# EAGLE board SparkFun_Bluetooth_Beacon_IN100-Panel (EAGLE 9.6.2), part 1 of 4
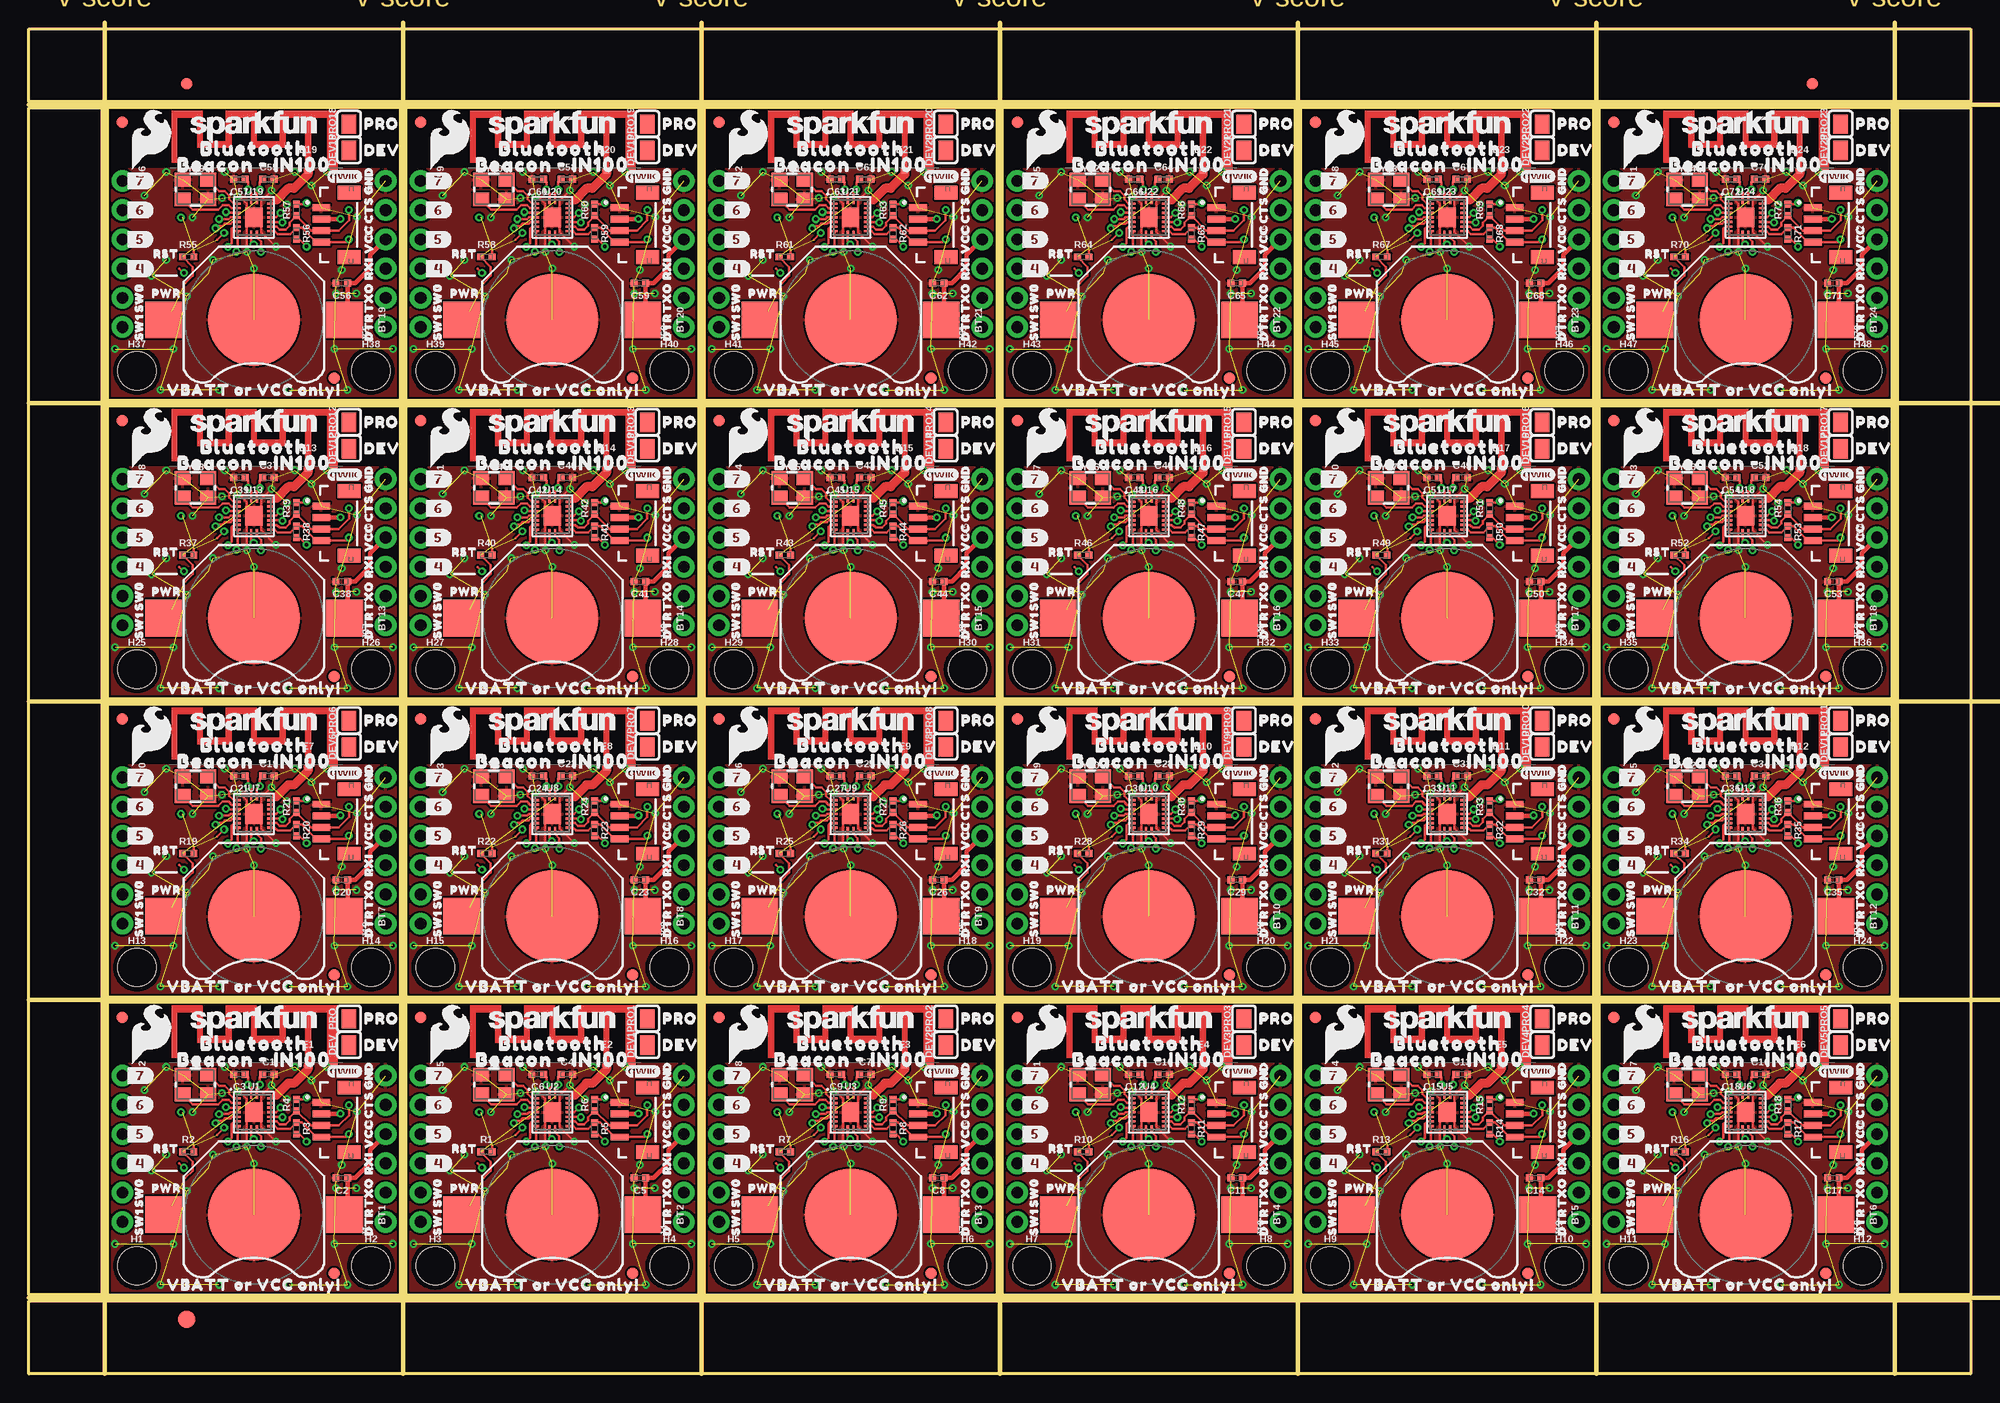
[diagram p0: board, top side]
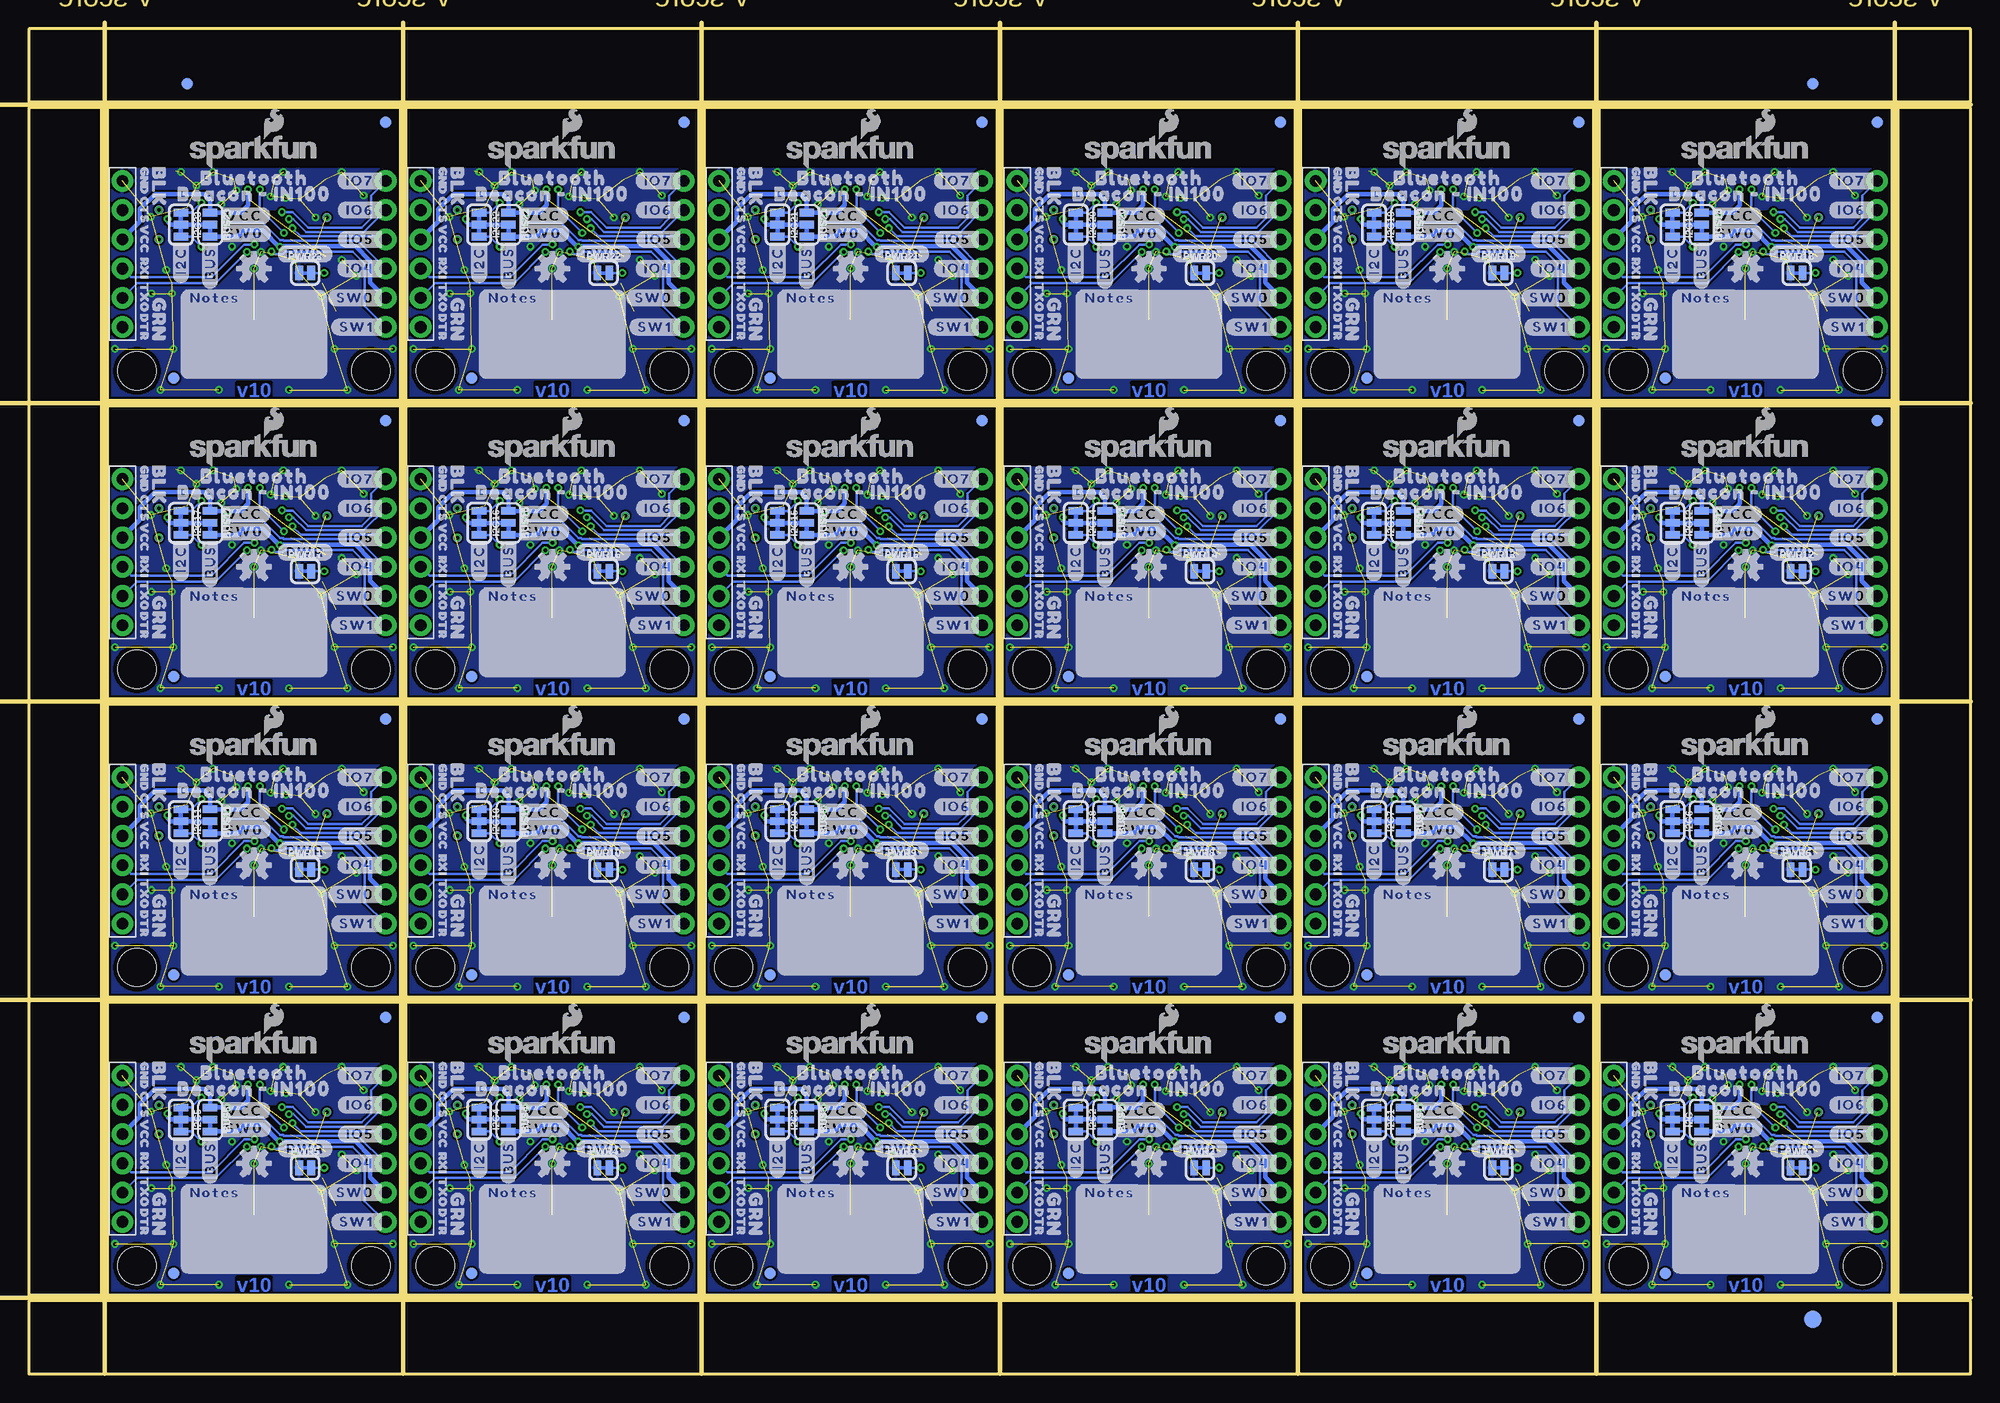
[diagram p1: board, bottom side, seen from below]

Size 168.66 x 116.84 mm. Coordinates in mm from the lower left corner, seen from the top.
Outline: 112 segments
Copper layers (1*16): Top 0.035mm / dielectric 1.5mm / Bottom 0.035mm
Design rules "SparkFun_Bluetooth_Beacon_IN100": minimum track width 7mil, minimum drill 0.3mm, track to track 7mil, track to pad 7mil, pad to pad 7mil, via to via 7mil, smd to smd 7mil, copper to edge 7mil, drill to drill 7mil, minimum pad ring 7mil, minimum via ring 7mil, stop-mask expansion 3mil, vias tented up to drill 25mil, thermal gap 7mil
tRestrict: area 18.5,23.6 to 18.7,23.7; area 20.4,23.6 to 20.6,23.7; area 18.5,21.7 to 18.7,21.8; area 20.4,21.7 to 20.6,21.8; area 44.4,23.6 to 44.6,23.7; area 46.4,23.6 to 46.5,23.7; area 44.4,21.7 to 44.6,21.8; area 46.4,21.7 to 46.5,21.8; area 70.4,23.6 to 70.5,23.7; area 72.3,23.6 to 72.4,23.7; area 70.4,21.7 to 70.5,21.8; area 72.3,21.7 to 72.4,21.8; 84 more areas
bRestrict: area 17.7,23.1 to 18.4,23.2; area 43.6,23.1 to 44.3,23.2; area 69.5,23.1 to 70.2,23.2; area 95.4,23.1 to 96.1,23.2; area 121.3,23.1 to 122,23.2; area 147.2,23.1 to 148,23.2; area 17.7,49 to 18.4,49.1; area 43.6,49 to 44.3,49.1; area 69.5,49 to 70.2,49.1; area 95.4,49 to 96.1,49.1; area 121.3,49 to 122,49.1; area 147.2,49 to 148,49.1; 12 more areas
Milling: 12 lines

## Footprints (pad centres in the part's own frame; a part is rotated, then mirrored left to right if it is on the bottom)
BATTCON_12MM = smd 8 x 8: GND 0,0 | smd 3.175 x 3.175: PWR@1 -7.874,0; PWR@2 7.874,0
SMT-JUMPER_3_1-NC_TRACE_SILK = smd 0.66 x 1.27: 1 -1.041,0; 2 0,0; 3 1.041,0
0402-TIGHT = smd 0.6 x 0.6: 1 -0.5,0; 2 0.5,0
PRODUCT_IDENT_PASTE_SILK = smd 1.676 x 1.27: 1 -0.025,0
TRACE_ANTENNA_2.4GHZ_15.2MM = smd 0.5 x 0.5: ANT 0,-0.25 | smd 0.9 x 0.5: GND 2.1,-0.25
FIDUCIAL-1X2 = smd 1 x 1: 1 0,0
FIDUCIAL-1.5X3 = smd 1.5 x 1.5: 1 0,0
STAND-OFF = hole 3.302: 0,0
SMT-JUMPER_3_2-NC_TRACE_SILK = smd 0.66 x 1.27: 1 -1.041,0; 2 0,0; 3 1.041,0
1X06_NO_SILK = drill 1.016 pad 1.88: 1 0,0; 2 2.54,0; 3 5.08,0; 4 7.62,0; 5 10.16,0; 6 12.7,0
JST04_1MM_VERT = smd 0.6 x 1.55: 1 -1.478,0.775; 2 -0.478,0.775; 3 0.522,0.775; 4 1.522,0.775 | smd 1.2 x 2: NC1 -2.778,3.2; NC2 2.822,3.2
SMT-JUMPER_2_NC_TRACE_SILK = smd 0.66 x 1.27: 1 -0.521,0; 2 0.521,0
PAD.03X.03 = smd 0.762 x 0.762: 1 0,0
IN100 = smd 0.5 x 0.2: 1 -1.4,1.2; 2 -1.4,0.8; 3 -1.4,0.4; 4 -1.4,0; 5 -1.4,-0.4; 6 -1.4,-0.8; 7 -1.4,-1.2; 10 1.4,-1.2; 11 1.4,-0.8; 12 1.4,-0.4; 13 1.4,0; 14 1.4,0.4; 15 1.4,0.8; 16 1.4,1.2 | smd 0.2 x 0.5: 8 -0.25,-1.4; 9 0.25,-1.4; 17 0.25,1.4; 18 -0.25,1.4 | smd 1.5 x 1.7: 19 0,0
CRYSTAL-SMD-3.2X2.5MM = smd 1.4 x 1.2: 1 -1.1,-0.85; 2 1.1,-0.85; 3 1.1,0.85; 4 -1.1,0.85

## Placement (x,y rotation side)
BT1  [BATTCON_12MM]  19.56,13.84 180 top
BT2  [BATTCON_12MM]  45.47,13.84 180 top
BT3  [BATTCON_12MM]  71.37,13.84 180 top
BT4  [BATTCON_12MM]  97.28,13.84 180 top
BT5  [BATTCON_12MM]  123.19,13.84 180 top
BT6  [BATTCON_12MM]  149.1,13.84 180 top
BT7  [BATTCON_12MM]  19.56,39.75 180 top
BT8  [BATTCON_12MM]  45.47,39.75 180 top
BT9  [BATTCON_12MM]  71.37,39.75 180 top
BT10  [BATTCON_12MM]  97.28,39.75 180 top
BT11  [BATTCON_12MM]  123.19,39.75 180 top
BT12  [BATTCON_12MM]  149.1,39.75 180 top
BT13  [BATTCON_12MM]  19.56,65.66 180 top
BT14  [BATTCON_12MM]  45.47,65.66 180 top
BT15  [BATTCON_12MM]  71.37,65.66 180 top
BT16  [BATTCON_12MM]  97.28,65.66 180 top
BT17  [BATTCON_12MM]  123.19,65.66 180 top
BT18  [BATTCON_12MM]  149.1,65.66 180 top
BT19  [BATTCON_12MM]  19.56,91.57 180 top
BT20  [BATTCON_12MM]  45.47,91.57 180 top
BT21  [BATTCON_12MM]  71.37,91.57 180 top
BT22  [BATTCON_12MM]  97.28,91.57 180 top
BT23  [BATTCON_12MM]  123.19,91.57 180 top
BT24  [BATTCON_12MM]  149.1,91.57 180 top
BUS  JUMPER-SMT_3_1-NC_TRACE_SILK  [SMT-JUMPER_3_1-NC_TRACE_SILK]  23.37,22.1 270 bottom
BUS1  JUMPER-SMT_3_1-NC_TRACE_SILK  [SMT-JUMPER_3_1-NC_TRACE_SILK]  49.28,22.1 270 bottom
BUS2  JUMPER-SMT_3_1-NC_TRACE_SILK  [SMT-JUMPER_3_1-NC_TRACE_SILK]  75.18,22.1 270 bottom
BUS3  JUMPER-SMT_3_1-NC_TRACE_SILK  [SMT-JUMPER_3_1-NC_TRACE_SILK]  101.09,22.1 270 bottom
BUS4  JUMPER-SMT_3_1-NC_TRACE_SILK  [SMT-JUMPER_3_1-NC_TRACE_SILK]  127,22.1 270 bottom
BUS5  JUMPER-SMT_3_1-NC_TRACE_SILK  [SMT-JUMPER_3_1-NC_TRACE_SILK]  152.91,22.1 270 bottom
BUS6  JUMPER-SMT_3_1-NC_TRACE_SILK  [SMT-JUMPER_3_1-NC_TRACE_SILK]  23.37,48.01 270 bottom
BUS7  JUMPER-SMT_3_1-NC_TRACE_SILK  [SMT-JUMPER_3_1-NC_TRACE_SILK]  49.28,48.01 270 bottom
BUS8  JUMPER-SMT_3_1-NC_TRACE_SILK  [SMT-JUMPER_3_1-NC_TRACE_SILK]  75.18,48.01 270 bottom
BUS9  JUMPER-SMT_3_1-NC_TRACE_SILK  [SMT-JUMPER_3_1-NC_TRACE_SILK]  101.09,48.01 270 bottom
BUS10  JUMPER-SMT_3_1-NC_TRACE_SILK  [SMT-JUMPER_3_1-NC_TRACE_SILK]  127,48.01 270 bottom
BUS11  JUMPER-SMT_3_1-NC_TRACE_SILK  [SMT-JUMPER_3_1-NC_TRACE_SILK]  152.91,48.01 270 bottom
BUS12  JUMPER-SMT_3_1-NC_TRACE_SILK  [SMT-JUMPER_3_1-NC_TRACE_SILK]  23.37,73.91 270 bottom
BUS13  JUMPER-SMT_3_1-NC_TRACE_SILK  [SMT-JUMPER_3_1-NC_TRACE_SILK]  49.28,73.91 270 bottom
BUS14  JUMPER-SMT_3_1-NC_TRACE_SILK  [SMT-JUMPER_3_1-NC_TRACE_SILK]  75.18,73.91 270 bottom
BUS15  JUMPER-SMT_3_1-NC_TRACE_SILK  [SMT-JUMPER_3_1-NC_TRACE_SILK]  101.09,73.91 270 bottom
BUS16  JUMPER-SMT_3_1-NC_TRACE_SILK  [SMT-JUMPER_3_1-NC_TRACE_SILK]  127,73.91 270 bottom
BUS17  JUMPER-SMT_3_1-NC_TRACE_SILK  [SMT-JUMPER_3_1-NC_TRACE_SILK]  152.91,73.91 270 bottom
BUS18  JUMPER-SMT_3_1-NC_TRACE_SILK  [SMT-JUMPER_3_1-NC_TRACE_SILK]  23.37,99.82 270 bottom
BUS19  JUMPER-SMT_3_1-NC_TRACE_SILK  [SMT-JUMPER_3_1-NC_TRACE_SILK]  49.28,99.82 270 bottom
BUS20  JUMPER-SMT_3_1-NC_TRACE_SILK  [SMT-JUMPER_3_1-NC_TRACE_SILK]  75.18,99.82 270 bottom
BUS21  JUMPER-SMT_3_1-NC_TRACE_SILK  [SMT-JUMPER_3_1-NC_TRACE_SILK]  101.09,99.82 270 bottom
BUS22  JUMPER-SMT_3_1-NC_TRACE_SILK  [SMT-JUMPER_3_1-NC_TRACE_SILK]  127,99.82 270 bottom
BUS23  JUMPER-SMT_3_1-NC_TRACE_SILK  [SMT-JUMPER_3_1-NC_TRACE_SILK]  152.91,99.82 270 bottom
C1  0.1uF  [0402-TIGHT]  20.83,26.04 0 top
C2  10uF  [0402-TIGHT]  27.18,17.02 180 top
C3  0.1uF  [0402-TIGHT]  18.29,26.04 180 top
C4  0.1uF  [0402-TIGHT]  46.74,26.04 0 top
C5  10uF  [0402-TIGHT]  53.09,17.02 180 top
C6  0.1uF  [0402-TIGHT]  44.2,26.04 180 top
C7  0.1uF  [0402-TIGHT]  72.64,26.04 0 top
C8  10uF  [0402-TIGHT]  78.99,17.02 180 top
C9  0.1uF  [0402-TIGHT]  70.1,26.04 180 top
C10  0.1uF  [0402-TIGHT]  98.55,26.04 0 top
C11  10uF  [0402-TIGHT]  104.9,17.02 180 top
C12  0.1uF  [0402-TIGHT]  96.01,26.04 180 top
C13  0.1uF  [0402-TIGHT]  124.46,26.04 0 top
C14  10uF  [0402-TIGHT]  130.81,17.02 180 top
C15  0.1uF  [0402-TIGHT]  121.92,26.04 180 top
C16  0.1uF  [0402-TIGHT]  150.37,26.04 0 top
C17  10uF  [0402-TIGHT]  156.72,17.02 180 top
C18  0.1uF  [0402-TIGHT]  147.83,26.04 180 top
C19  0.1uF  [0402-TIGHT]  20.83,51.94 0 top
C20  10uF  [0402-TIGHT]  27.18,42.93 180 top
C21  0.1uF  [0402-TIGHT]  18.29,51.94 180 top
C22  0.1uF  [0402-TIGHT]  46.74,51.94 0 top
C23  10uF  [0402-TIGHT]  53.09,42.93 180 top
C24  0.1uF  [0402-TIGHT]  44.2,51.94 180 top
C25  0.1uF  [0402-TIGHT]  72.64,51.94 0 top
C26  10uF  [0402-TIGHT]  78.99,42.93 180 top
C27  0.1uF  [0402-TIGHT]  70.1,51.94 180 top
C28  0.1uF  [0402-TIGHT]  98.55,51.94 0 top
C29  10uF  [0402-TIGHT]  104.9,42.93 180 top
C30  0.1uF  [0402-TIGHT]  96.01,51.94 180 top
C31  0.1uF  [0402-TIGHT]  124.46,51.94 0 top
C32  10uF  [0402-TIGHT]  130.81,42.93 180 top
C33  0.1uF  [0402-TIGHT]  121.92,51.94 180 top
C34  0.1uF  [0402-TIGHT]  150.37,51.94 0 top
C35  10uF  [0402-TIGHT]  156.72,42.93 180 top
C36  0.1uF  [0402-TIGHT]  147.83,51.94 180 top
C37  0.1uF  [0402-TIGHT]  20.83,77.85 0 top
C38  10uF  [0402-TIGHT]  27.18,68.83 180 top
C39  0.1uF  [0402-TIGHT]  18.29,77.85 180 top
C40  0.1uF  [0402-TIGHT]  46.74,77.85 0 top
C41  10uF  [0402-TIGHT]  53.09,68.83 180 top
C42  0.1uF  [0402-TIGHT]  44.2,77.85 180 top
C43  0.1uF  [0402-TIGHT]  72.64,77.85 0 top
C44  10uF  [0402-TIGHT]  78.99,68.83 180 top
C45  0.1uF  [0402-TIGHT]  70.1,77.85 180 top
C46  0.1uF  [0402-TIGHT]  98.55,77.85 0 top
C47  10uF  [0402-TIGHT]  104.9,68.83 180 top
C48  0.1uF  [0402-TIGHT]  96.01,77.85 180 top
C49  0.1uF  [0402-TIGHT]  124.46,77.85 0 top
C50  10uF  [0402-TIGHT]  130.81,68.83 180 top
C51  0.1uF  [0402-TIGHT]  121.92,77.85 180 top
C52  0.1uF  [0402-TIGHT]  150.37,77.85 0 top
C53  10uF  [0402-TIGHT]  156.72,68.83 180 top
C54  0.1uF  [0402-TIGHT]  147.83,77.85 180 top
C55  0.1uF  [0402-TIGHT]  20.83,103.76 0 top
C56  10uF  [0402-TIGHT]  27.18,94.74 180 top
C57  0.1uF  [0402-TIGHT]  18.29,103.76 180 top
C58  0.1uF  [0402-TIGHT]  46.74,103.76 0 top
C59  10uF  [0402-TIGHT]  53.09,94.74 180 top
C60  0.1uF  [0402-TIGHT]  44.2,103.76 180 top
C61  0.1uF  [0402-TIGHT]  72.64,103.76 0 top
C62  10uF  [0402-TIGHT]  78.99,94.74 180 top
C63  0.1uF  [0402-TIGHT]  70.1,103.76 180 top
C64  0.1uF  [0402-TIGHT]  98.55,103.76 0 top
C65  10uF  [0402-TIGHT]  104.9,94.74 180 top
C66  0.1uF  [0402-TIGHT]  96.01,103.76 180 top
C67  0.1uF  [0402-TIGHT]  124.46,103.76 0 top
C68  10uF  [0402-TIGHT]  130.81,94.74 180 top
C69  0.1uF  [0402-TIGHT]  121.92,103.76 180 top
C70  0.1uF  [0402-TIGHT]  150.37,103.76 0 top
C71  10uF  [0402-TIGHT]  156.72,94.74 180 top
C72  0.1uF  [0402-TIGHT]  147.83,103.76 180 top
DEV  PROD_ID_PASTE_SILK  [PRODUCT_IDENT_PASTE_SILK]  27.81,28.57 90 top
DEV1  PROD_ID_PASTE_SILK  [PRODUCT_IDENT_PASTE_SILK]  53.72,28.57 90 top
DEV2  PROD_ID_PASTE_SILK  [PRODUCT_IDENT_PASTE_SILK]  79.63,28.57 90 top
DEV3  PROD_ID_PASTE_SILK  [PRODUCT_IDENT_PASTE_SILK]  105.54,28.57 90 top
DEV4  PROD_ID_PASTE_SILK  [PRODUCT_IDENT_PASTE_SILK]  131.44,28.57 90 top
DEV5  PROD_ID_PASTE_SILK  [PRODUCT_IDENT_PASTE_SILK]  157.35,28.57 90 top
DEV6  PROD_ID_PASTE_SILK  [PRODUCT_IDENT_PASTE_SILK]  27.81,54.48 90 top
DEV7  PROD_ID_PASTE_SILK  [PRODUCT_IDENT_PASTE_SILK]  53.72,54.48 90 top
DEV8  PROD_ID_PASTE_SILK  [PRODUCT_IDENT_PASTE_SILK]  79.63,54.48 90 top
DEV9  PROD_ID_PASTE_SILK  [PRODUCT_IDENT_PASTE_SILK]  105.54,54.48 90 top
DEV10  PROD_ID_PASTE_SILK  [PRODUCT_IDENT_PASTE_SILK]  131.44,54.48 90 top
DEV11  PROD_ID_PASTE_SILK  [PRODUCT_IDENT_PASTE_SILK]  157.35,54.48 90 top
DEV12  PROD_ID_PASTE_SILK  [PRODUCT_IDENT_PASTE_SILK]  27.81,80.39 90 top
DEV13  PROD_ID_PASTE_SILK  [PRODUCT_IDENT_PASTE_SILK]  53.72,80.39 90 top
DEV14  PROD_ID_PASTE_SILK  [PRODUCT_IDENT_PASTE_SILK]  79.63,80.39 90 top
DEV15  PROD_ID_PASTE_SILK  [PRODUCT_IDENT_PASTE_SILK]  105.54,80.39 90 top
DEV16  PROD_ID_PASTE_SILK  [PRODUCT_IDENT_PASTE_SILK]  131.44,80.39 90 top
DEV17  PROD_ID_PASTE_SILK  [PRODUCT_IDENT_PASTE_SILK]  157.35,80.39 90 top
DEV18  PROD_ID_PASTE_SILK  [PRODUCT_IDENT_PASTE_SILK]  27.81,106.3 90 top
DEV19  PROD_ID_PASTE_SILK  [PRODUCT_IDENT_PASTE_SILK]  53.72,106.3 90 top
DEV20  PROD_ID_PASTE_SILK  [PRODUCT_IDENT_PASTE_SILK]  79.63,106.3 90 top
DEV21  PROD_ID_PASTE_SILK  [PRODUCT_IDENT_PASTE_SILK]  105.54,106.3 90 top
DEV22  PROD_ID_PASTE_SILK  [PRODUCT_IDENT_PASTE_SILK]  131.44,106.3 90 top
DEV23  PROD_ID_PASTE_SILK  [PRODUCT_IDENT_PASTE_SILK]  157.35,106.3 90 top
E1  ANTENNA-GROUNDEDTRACE-15.2MM  [TRACE_ANTENNA_2.4GHZ_15.2MM]  24.26,27.05 0 top
E2  ANTENNA-GROUNDEDTRACE-15.2MM  [TRACE_ANTENNA_2.4GHZ_15.2MM]  50.16,27.05 0 top
E3  ANTENNA-GROUNDEDTRACE-15.2MM  [TRACE_ANTENNA_2.4GHZ_15.2MM]  76.07,27.05 0 top
E4  ANTENNA-GROUNDEDTRACE-15.2MM  [TRACE_ANTENNA_2.4GHZ_15.2MM]  101.98,27.05 0 top
E5  ANTENNA-GROUNDEDTRACE-15.2MM  [TRACE_ANTENNA_2.4GHZ_15.2MM]  127.89,27.05 0 top
E6  ANTENNA-GROUNDEDTRACE-15.2MM  [TRACE_ANTENNA_2.4GHZ_15.2MM]  153.8,27.05 0 top
E7  ANTENNA-GROUNDEDTRACE-15.2MM  [TRACE_ANTENNA_2.4GHZ_15.2MM]  24.26,52.96 0 top
E8  ANTENNA-GROUNDEDTRACE-15.2MM  [TRACE_ANTENNA_2.4GHZ_15.2MM]  50.16,52.96 0 top
E9  ANTENNA-GROUNDEDTRACE-15.2MM  [TRACE_ANTENNA_2.4GHZ_15.2MM]  76.07,52.96 0 top
E10  ANTENNA-GROUNDEDTRACE-15.2MM  [TRACE_ANTENNA_2.4GHZ_15.2MM]  101.98,52.96 0 top
E11  ANTENNA-GROUNDEDTRACE-15.2MM  [TRACE_ANTENNA_2.4GHZ_15.2MM]  127.89,52.96 0 top
E12  ANTENNA-GROUNDEDTRACE-15.2MM  [TRACE_ANTENNA_2.4GHZ_15.2MM]  153.8,52.96 0 top
E13  ANTENNA-GROUNDEDTRACE-15.2MM  [TRACE_ANTENNA_2.4GHZ_15.2MM]  24.26,78.87 0 top
E14  ANTENNA-GROUNDEDTRACE-15.2MM  [TRACE_ANTENNA_2.4GHZ_15.2MM]  50.16,78.87 0 top
E15  ANTENNA-GROUNDEDTRACE-15.2MM  [TRACE_ANTENNA_2.4GHZ_15.2MM]  76.07,78.87 0 top
E16  ANTENNA-GROUNDEDTRACE-15.2MM  [TRACE_ANTENNA_2.4GHZ_15.2MM]  101.98,78.87 0 top
E17  ANTENNA-GROUNDEDTRACE-15.2MM  [TRACE_ANTENNA_2.4GHZ_15.2MM]  127.89,78.87 0 top
E18  ANTENNA-GROUNDEDTRACE-15.2MM  [TRACE_ANTENNA_2.4GHZ_15.2MM]  153.8,78.87 0 top
E19  ANTENNA-GROUNDEDTRACE-15.2MM  [TRACE_ANTENNA_2.4GHZ_15.2MM]  24.26,104.78 0 top
E20  ANTENNA-GROUNDEDTRACE-15.2MM  [TRACE_ANTENNA_2.4GHZ_15.2MM]  50.16,104.78 0 top
E21  ANTENNA-GROUNDEDTRACE-15.2MM  [TRACE_ANTENNA_2.4GHZ_15.2MM]  76.07,104.78 0 top
E22  ANTENNA-GROUNDEDTRACE-15.2MM  [TRACE_ANTENNA_2.4GHZ_15.2MM]  101.98,104.78 0 top
E23  ANTENNA-GROUNDEDTRACE-15.2MM  [TRACE_ANTENNA_2.4GHZ_15.2MM]  127.89,104.78 0 top
E24  ANTENNA-GROUNDEDTRACE-15.2MM  [TRACE_ANTENNA_2.4GHZ_15.2MM]  153.8,104.78 0 top
E$1  [FIDUCIAL-1X2]  13.72,112.08 0 top
E$2  [FIDUCIAL-1X2]  13.72,112.08 0 bottom
E$3  [FIDUCIAL-1X2]  154.88,112.08 0 top
E$4  [FIDUCIAL-1X2]  154.88,112.08 0 bottom
E$5  [FIDUCIAL-1.5X3]  13.72,4.76 0 top
E$6  [FIDUCIAL-1.5X3]  13.72,4.76 0 bottom
FD1  FIDUCIAL1X2  [FIDUCIAL-1X2]  8.13,30.99 0 bottom
FD2  FIDUCIAL1X2  [FIDUCIAL-1X2]  8.13,30.99 0 top
FD3  FIDUCIAL1X2  [FIDUCIAL-1X2]  26.54,8.76 0 bottom
FD4  FIDUCIAL1X2  [FIDUCIAL-1X2]  26.54,8.76 0 top
FD5  FIDUCIAL1X2  [FIDUCIAL-1X2]  34.04,30.99 0 bottom
FD6  FIDUCIAL1X2  [FIDUCIAL-1X2]  34.04,30.99 0 top
FD7  FIDUCIAL1X2  [FIDUCIAL-1X2]  52.45,8.76 0 bottom
FD8  FIDUCIAL1X2  [FIDUCIAL-1X2]  52.45,8.76 0 top
FD9  FIDUCIAL1X2  [FIDUCIAL-1X2]  59.94,30.99 0 bottom
FD10  FIDUCIAL1X2  [FIDUCIAL-1X2]  59.94,30.99 0 top
FD11  FIDUCIAL1X2  [FIDUCIAL-1X2]  78.36,8.76 0 bottom
FD12  FIDUCIAL1X2  [FIDUCIAL-1X2]  78.36,8.76 0 top
FD13  FIDUCIAL1X2  [FIDUCIAL-1X2]  85.85,30.99 0 bottom
FD14  FIDUCIAL1X2  [FIDUCIAL-1X2]  85.85,30.99 0 top
FD15  FIDUCIAL1X2  [FIDUCIAL-1X2]  104.27,8.76 0 bottom
FD16  FIDUCIAL1X2  [FIDUCIAL-1X2]  104.27,8.76 0 top
FD17  FIDUCIAL1X2  [FIDUCIAL-1X2]  111.76,30.99 0 bottom
FD18  FIDUCIAL1X2  [FIDUCIAL-1X2]  111.76,30.99 0 top
FD19  FIDUCIAL1X2  [FIDUCIAL-1X2]  130.17,8.76 0 bottom
FD20  FIDUCIAL1X2  [FIDUCIAL-1X2]  130.17,8.76 0 top
FD21  FIDUCIAL1X2  [FIDUCIAL-1X2]  137.67,30.99 0 bottom
FD22  FIDUCIAL1X2  [FIDUCIAL-1X2]  137.67,30.99 0 top
FD23  FIDUCIAL1X2  [FIDUCIAL-1X2]  156.08,8.76 0 bottom
FD24  FIDUCIAL1X2  [FIDUCIAL-1X2]  156.08,8.76 0 top
FD25  FIDUCIAL1X2  [FIDUCIAL-1X2]  8.13,56.9 0 bottom
FD26  FIDUCIAL1X2  [FIDUCIAL-1X2]  8.13,56.9 0 top
FD27  FIDUCIAL1X2  [FIDUCIAL-1X2]  26.54,34.67 0 bottom
FD28  FIDUCIAL1X2  [FIDUCIAL-1X2]  26.54,34.67 0 top
FD29  FIDUCIAL1X2  [FIDUCIAL-1X2]  34.04,56.9 0 bottom
FD30  FIDUCIAL1X2  [FIDUCIAL-1X2]  34.04,56.9 0 top
FD31  FIDUCIAL1X2  [FIDUCIAL-1X2]  52.45,34.67 0 bottom
FD32  FIDUCIAL1X2  [FIDUCIAL-1X2]  52.45,34.67 0 top
FD33  FIDUCIAL1X2  [FIDUCIAL-1X2]  59.94,56.9 0 bottom
FD34  FIDUCIAL1X2  [FIDUCIAL-1X2]  59.94,56.9 0 top
FD35  FIDUCIAL1X2  [FIDUCIAL-1X2]  78.36,34.67 0 bottom
FD36  FIDUCIAL1X2  [FIDUCIAL-1X2]  78.36,34.67 0 top
FD37  FIDUCIAL1X2  [FIDUCIAL-1X2]  85.85,56.9 0 bottom
FD38  FIDUCIAL1X2  [FIDUCIAL-1X2]  85.85,56.9 0 top
FD39  FIDUCIAL1X2  [FIDUCIAL-1X2]  104.27,34.67 0 bottom
FD40  FIDUCIAL1X2  [FIDUCIAL-1X2]  104.27,34.67 0 top
FD41  FIDUCIAL1X2  [FIDUCIAL-1X2]  111.76,56.9 0 bottom
FD42  FIDUCIAL1X2  [FIDUCIAL-1X2]  111.76,56.9 0 top
FD43  FIDUCIAL1X2  [FIDUCIAL-1X2]  130.17,34.67 0 bottom
FD44  FIDUCIAL1X2  [FIDUCIAL-1X2]  130.17,34.67 0 top
FD45  FIDUCIAL1X2  [FIDUCIAL-1X2]  137.67,56.9 0 bottom
FD46  FIDUCIAL1X2  [FIDUCIAL-1X2]  137.67,56.9 0 top
FD47  FIDUCIAL1X2  [FIDUCIAL-1X2]  156.08,34.67 0 bottom
FD48  FIDUCIAL1X2  [FIDUCIAL-1X2]  156.08,34.67 0 top
FD49  FIDUCIAL1X2  [FIDUCIAL-1X2]  8.13,82.8 0 bottom
FD50  FIDUCIAL1X2  [FIDUCIAL-1X2]  8.13,82.8 0 top
FD51  FIDUCIAL1X2  [FIDUCIAL-1X2]  26.54,60.58 0 bottom
FD52  FIDUCIAL1X2  [FIDUCIAL-1X2]  26.54,60.58 0 top
FD53  FIDUCIAL1X2  [FIDUCIAL-1X2]  34.04,82.8 0 bottom
FD54  FIDUCIAL1X2  [FIDUCIAL-1X2]  34.04,82.8 0 top
FD55  FIDUCIAL1X2  [FIDUCIAL-1X2]  52.45,60.58 0 bottom
FD56  FIDUCIAL1X2  [FIDUCIAL-1X2]  52.45,60.58 0 top
FD57  FIDUCIAL1X2  [FIDUCIAL-1X2]  59.94,82.8 0 bottom
FD58  FIDUCIAL1X2  [FIDUCIAL-1X2]  59.94,82.8 0 top
FD59  FIDUCIAL1X2  [FIDUCIAL-1X2]  78.36,60.58 0 bottom
FD60  FIDUCIAL1X2  [FIDUCIAL-1X2]  78.36,60.58 0 top
FD61  FIDUCIAL1X2  [FIDUCIAL-1X2]  85.85,82.8 0 bottom
FD62  FIDUCIAL1X2  [FIDUCIAL-1X2]  85.85,82.8 0 top
FD63  FIDUCIAL1X2  [FIDUCIAL-1X2]  104.27,60.58 0 bottom
FD64  FIDUCIAL1X2  [FIDUCIAL-1X2]  104.27,60.58 0 top
FD65  FIDUCIAL1X2  [FIDUCIAL-1X2]  111.76,82.8 0 bottom
FD66  FIDUCIAL1X2  [FIDUCIAL-1X2]  111.76,82.8 0 top
FD67  FIDUCIAL1X2  [FIDUCIAL-1X2]  130.17,60.58 0 bottom
FD68  FIDUCIAL1X2  [FIDUCIAL-1X2]  130.17,60.58 0 top
FD69  FIDUCIAL1X2  [FIDUCIAL-1X2]  137.67,82.8 0 bottom
FD70  FIDUCIAL1X2  [FIDUCIAL-1X2]  137.67,82.8 0 top
FD71  FIDUCIAL1X2  [FIDUCIAL-1X2]  156.08,60.58 0 bottom
FD72  FIDUCIAL1X2  [FIDUCIAL-1X2]  156.08,60.58 0 top
FD73  FIDUCIAL1X2  [FIDUCIAL-1X2]  8.13,108.71 0 bottom
FD74  FIDUCIAL1X2  [FIDUCIAL-1X2]  8.13,108.71 0 top
FD75  FIDUCIAL1X2  [FIDUCIAL-1X2]  26.54,86.49 0 bottom
FD76  FIDUCIAL1X2  [FIDUCIAL-1X2]  26.54,86.49 0 top
FD77  FIDUCIAL1X2  [FIDUCIAL-1X2]  34.04,108.71 0 bottom
FD78  FIDUCIAL1X2  [FIDUCIAL-1X2]  34.04,108.71 0 top
FD79  FIDUCIAL1X2  [FIDUCIAL-1X2]  52.45,86.49 0 bottom
FD80  FIDUCIAL1X2  [FIDUCIAL-1X2]  52.45,86.49 0 top
FD81  FIDUCIAL1X2  [FIDUCIAL-1X2]  59.94,108.71 0 bottom
FD82  FIDUCIAL1X2  [FIDUCIAL-1X2]  59.94,108.71 0 top
FD83  FIDUCIAL1X2  [FIDUCIAL-1X2]  78.36,86.49 0 bottom
FD84  FIDUCIAL1X2  [FIDUCIAL-1X2]  78.36,86.49 0 top
FD85  FIDUCIAL1X2  [FIDUCIAL-1X2]  85.85,108.71 0 bottom
FD86  FIDUCIAL1X2  [FIDUCIAL-1X2]  85.85,108.71 0 top
FD87  FIDUCIAL1X2  [FIDUCIAL-1X2]  104.27,86.49 0 bottom
FD88  FIDUCIAL1X2  [FIDUCIAL-1X2]  104.27,86.49 0 top
FD89  FIDUCIAL1X2  [FIDUCIAL-1X2]  111.76,108.71 0 bottom
FD90  FIDUCIAL1X2  [FIDUCIAL-1X2]  111.76,108.71 0 top
FD91  FIDUCIAL1X2  [FIDUCIAL-1X2]  130.17,86.49 0 bottom
FD92  FIDUCIAL1X2  [FIDUCIAL-1X2]  130.17,86.49 0 top
FD93  FIDUCIAL1X2  [FIDUCIAL-1X2]  137.67,108.71 0 bottom
FD94  FIDUCIAL1X2  [FIDUCIAL-1X2]  137.67,108.71 0 top
FD95  FIDUCIAL1X2  [FIDUCIAL-1X2]  156.08,86.49 0 bottom
FD96  FIDUCIAL1X2  [FIDUCIAL-1X2]  156.08,86.49 0 top
H1  STAND-OFF  [STAND-OFF]  9.4,9.4 0 top
H2  STAND-OFF  [STAND-OFF]  29.72,9.4 0 top
H3  STAND-OFF  [STAND-OFF]  35.31,9.4 0 top
H4  STAND-OFF  [STAND-OFF]  55.63,9.4 0 top
H5  STAND-OFF  [STAND-OFF]  61.21,9.4 0 top
H6  STAND-OFF  [STAND-OFF]  81.53,9.4 0 top
H7  STAND-OFF  [STAND-OFF]  87.12,9.4 0 top
H8  STAND-OFF  [STAND-OFF]  107.44,9.4 0 top
H9  STAND-OFF  [STAND-OFF]  113.03,9.4 0 top
H10  STAND-OFF  [STAND-OFF]  133.35,9.4 0 top
H11  STAND-OFF  [STAND-OFF]  138.94,9.4 0 top
H12  STAND-OFF  [STAND-OFF]  159.26,9.4 0 top
H13  STAND-OFF  [STAND-OFF]  9.4,35.31 0 top
H14  STAND-OFF  [STAND-OFF]  29.72,35.31 0 top
H15  STAND-OFF  [STAND-OFF]  35.31,35.31 0 top
H16  STAND-OFF  [STAND-OFF]  55.63,35.31 0 top
H17  STAND-OFF  [STAND-OFF]  61.21,35.31 0 top
H18  STAND-OFF  [STAND-OFF]  81.53,35.31 0 top
H19  STAND-OFF  [STAND-OFF]  87.12,35.31 0 top
H20  STAND-OFF  [STAND-OFF]  107.44,35.31 0 top
H21  STAND-OFF  [STAND-OFF]  113.03,35.31 0 top
H22  STAND-OFF  [STAND-OFF]  133.35,35.31 0 top
H23  STAND-OFF  [STAND-OFF]  138.94,35.31 0 top
H24  STAND-OFF  [STAND-OFF]  159.26,35.31 0 top
H25  STAND-OFF  [STAND-OFF]  9.4,61.21 0 top
H26  STAND-OFF  [STAND-OFF]  29.72,61.21 0 top
H27  STAND-OFF  [STAND-OFF]  35.31,61.21 0 top
H28  STAND-OFF  [STAND-OFF]  55.63,61.21 0 top
H29  STAND-OFF  [STAND-OFF]  61.21,61.21 0 top
H30  STAND-OFF  [STAND-OFF]  81.53,61.21 0 top
H31  STAND-OFF  [STAND-OFF]  87.12,61.21 0 top
H32  STAND-OFF  [STAND-OFF]  107.44,61.21 0 top
H33  STAND-OFF  [STAND-OFF]  113.03,61.21 0 top
H34  STAND-OFF  [STAND-OFF]  133.35,61.21 0 top
H35  STAND-OFF  [STAND-OFF]  138.94,61.21 0 top
H36  STAND-OFF  [STAND-OFF]  159.26,61.21 0 top
H37  STAND-OFF  [STAND-OFF]  9.4,87.12 0 top
H38  STAND-OFF  [STAND-OFF]  29.72,87.12 0 top
H39  STAND-OFF  [STAND-OFF]  35.31,87.12 0 top
H40  STAND-OFF  [STAND-OFF]  55.63,87.12 0 top
H41  STAND-OFF  [STAND-OFF]  61.21,87.12 0 top
H42  STAND-OFF  [STAND-OFF]  81.53,87.12 0 top
H43  STAND-OFF  [STAND-OFF]  87.12,87.12 0 top
H44  STAND-OFF  [STAND-OFF]  107.44,87.12 0 top
H45  STAND-OFF  [STAND-OFF]  113.03,87.12 0 top
H46  STAND-OFF  [STAND-OFF]  133.35,87.12 0 top
H47  STAND-OFF  [STAND-OFF]  138.94,87.12 0 top
H48  STAND-OFF  [STAND-OFF]  159.26,87.12 0 top
I2C  JUMPER-SMT_3_2-NC_TRACE_SILK  [SMT-JUMPER_3_2-NC_TRACE_SILK]  25.91,22.1 270 bottom
I2C1  JUMPER-SMT_3_2-NC_TRACE_SILK  [SMT-JUMPER_3_2-NC_TRACE_SILK]  51.82,22.1 270 bottom
I2C2  JUMPER-SMT_3_2-NC_TRACE_SILK  [SMT-JUMPER_3_2-NC_TRACE_SILK]  77.72,22.1 270 bottom
I2C3  JUMPER-SMT_3_2-NC_TRACE_SILK  [SMT-JUMPER_3_2-NC_TRACE_SILK]  103.63,22.1 270 bottom
I2C4  JUMPER-SMT_3_2-NC_TRACE_SILK  [SMT-JUMPER_3_2-NC_TRACE_SILK]  129.54,22.1 270 bottom
I2C5  JUMPER-SMT_3_2-NC_TRACE_SILK  [SMT-JUMPER_3_2-NC_TRACE_SILK]  155.45,22.1 270 bottom
I2C6  JUMPER-SMT_3_2-NC_TRACE_SILK  [SMT-JUMPER_3_2-NC_TRACE_SILK]  25.91,48.01 270 bottom
I2C7  JUMPER-SMT_3_2-NC_TRACE_SILK  [SMT-JUMPER_3_2-NC_TRACE_SILK]  51.82,48.01 270 bottom
I2C8  JUMPER-SMT_3_2-NC_TRACE_SILK  [SMT-JUMPER_3_2-NC_TRACE_SILK]  77.72,48.01 270 bottom
I2C9  JUMPER-SMT_3_2-NC_TRACE_SILK  [SMT-JUMPER_3_2-NC_TRACE_SILK]  103.63,48.01 270 bottom
I2C10  JUMPER-SMT_3_2-NC_TRACE_SILK  [SMT-JUMPER_3_2-NC_TRACE_SILK]  129.54,48.01 270 bottom
I2C11  JUMPER-SMT_3_2-NC_TRACE_SILK  [SMT-JUMPER_3_2-NC_TRACE_SILK]  155.45,48.01 270 bottom
I2C12  JUMPER-SMT_3_2-NC_TRACE_SILK  [SMT-JUMPER_3_2-NC_TRACE_SILK]  25.91,73.91 270 bottom
I2C13  JUMPER-SMT_3_2-NC_TRACE_SILK  [SMT-JUMPER_3_2-NC_TRACE_SILK]  51.82,73.91 270 bottom
I2C14  JUMPER-SMT_3_2-NC_TRACE_SILK  [SMT-JUMPER_3_2-NC_TRACE_SILK]  77.72,73.91 270 bottom
I2C15  JUMPER-SMT_3_2-NC_TRACE_SILK  [SMT-JUMPER_3_2-NC_TRACE_SILK]  103.63,73.91 270 bottom
I2C16  JUMPER-SMT_3_2-NC_TRACE_SILK  [SMT-JUMPER_3_2-NC_TRACE_SILK]  129.54,73.91 270 bottom
I2C17  JUMPER-SMT_3_2-NC_TRACE_SILK  [SMT-JUMPER_3_2-NC_TRACE_SILK]  155.45,73.91 270 bottom
I2C18  JUMPER-SMT_3_2-NC_TRACE_SILK  [SMT-JUMPER_3_2-NC_TRACE_SILK]  25.91,99.82 270 bottom
I2C19  JUMPER-SMT_3_2-NC_TRACE_SILK  [SMT-JUMPER_3_2-NC_TRACE_SILK]  51.82,99.82 270 bottom
I2C20  JUMPER-SMT_3_2-NC_TRACE_SILK  [SMT-JUMPER_3_2-NC_TRACE_SILK]  77.72,99.82 270 bottom
I2C21  JUMPER-SMT_3_2-NC_TRACE_SILK  [SMT-JUMPER_3_2-NC_TRACE_SILK]  103.63,99.82 270 bottom
I2C22  JUMPER-SMT_3_2-NC_TRACE_SILK  [SMT-JUMPER_3_2-NC_TRACE_SILK]  129.54,99.82 270 bottom
I2C23  JUMPER-SMT_3_2-NC_TRACE_SILK  [SMT-JUMPER_3_2-NC_TRACE_SILK]  155.45,99.82 270 bottom
J1  [1X06_NO_SILK]  30.99,13.21 90 top
J2  [1X06_NO_SILK]  8.13,25.91 270 top
J3  Vertical Qwiic Connector  [JST04_1MM_VERT]  24.64,22.1 270 top
J4  [1X06_NO_SILK]  56.9,13.21 90 top
J5  [1X06_NO_SILK]  34.04,25.91 270 top
J6  Vertical Qwiic Connector  [JST04_1MM_VERT]  50.55,22.1 270 top
J7  [1X06_NO_SILK]  82.8,13.21 90 top
J8  [1X06_NO_SILK]  59.94,25.91 270 top
J9  Vertical Qwiic Connector  [JST04_1MM_VERT]  76.45,22.1 270 top
J10  [1X06_NO_SILK]  108.71,13.21 90 top
J11  [1X06_NO_SILK]  85.85,25.91 270 top
J12  Vertical Qwiic Connector  [JST04_1MM_VERT]  102.36,22.1 270 top
J13  [1X06_NO_SILK]  134.62,13.21 90 top
J14  [1X06_NO_SILK]  111.76,25.91 270 top
J15  Vertical Qwiic Connector  [JST04_1MM_VERT]  128.27,22.1 270 top
J16  [1X06_NO_SILK]  160.53,13.21 90 top
J17  [1X06_NO_SILK]  137.67,25.91 270 top
J18  Vertical Qwiic Connector  [JST04_1MM_VERT]  154.18,22.1 270 top
J19  [1X06_NO_SILK]  30.99,39.12 90 top
J20  [1X06_NO_SILK]  8.13,51.82 270 top
J21  Vertical Qwiic Connector  [JST04_1MM_VERT]  24.64,48.01 270 top
J22  [1X06_NO_SILK]  56.9,39.12 90 top
J23  [1X06_NO_SILK]  34.04,51.82 270 top
J24  Vertical Qwiic Connector  [JST04_1MM_VERT]  50.55,48.01 270 top
J25  [1X06_NO_SILK]  82.8,39.12 90 top
J26  [1X06_NO_SILK]  59.94,51.82 270 top
J27  Vertical Qwiic Connector  [JST04_1MM_VERT]  76.45,48.01 270 top
J28  [1X06_NO_SILK]  108.71,39.12 90 top
J29  [1X06_NO_SILK]  85.85,51.82 270 top
J30  Vertical Qwiic Connector  [JST04_1MM_VERT]  102.36,48.01 270 top
J31  [1X06_NO_SILK]  134.62,39.12 90 top
J32  [1X06_NO_SILK]  111.76,51.82 270 top
J33  Vertical Qwiic Connector  [JST04_1MM_VERT]  128.27,48.01 270 top
J34  [1X06_NO_SILK]  160.53,39.12 90 top
J35  [1X06_NO_SILK]  137.67,51.82 270 top
J36  Vertical Qwiic Connector  [JST04_1MM_VERT]  154.18,48.01 270 top
J37  [1X06_NO_SILK]  30.99,65.02 90 top
J38  [1X06_NO_SILK]  8.13,77.72 270 top
J39  Vertical Qwiic Connector  [JST04_1MM_VERT]  24.64,73.91 270 top
J40  [1X06_NO_SILK]  56.9,65.02 90 top
J41  [1X06_NO_SILK]  34.04,77.72 270 top
J42  Vertical Qwiic Connector  [JST04_1MM_VERT]  50.55,73.91 270 top
J43  [1X06_NO_SILK]  82.8,65.02 90 top
J44  [1X06_NO_SILK]  59.94,77.72 270 top
J45  Vertical Qwiic Connector  [JST04_1MM_VERT]  76.45,73.91 270 top
J46  [1X06_NO_SILK]  108.71,65.02 90 top
J47  [1X06_NO_SILK]  85.85,77.72 270 top
J48  Vertical Qwiic Connector  [JST04_1MM_VERT]  102.36,73.91 270 top
J49  [1X06_NO_SILK]  134.62,65.02 90 top
J50  [1X06_NO_SILK]  111.76,77.72 270 top
J51  Vertical Qwiic Connector  [JST04_1MM_VERT]  128.27,73.91 270 top
J52  [1X06_NO_SILK]  160.53,65.02 90 top
J53  [1X06_NO_SILK]  137.67,77.72 270 top
J54  Vertical Qwiic Connector  [JST04_1MM_VERT]  154.18,73.91 270 top
J55  [1X06_NO_SILK]  30.99,90.93 90 top
J56  [1X06_NO_SILK]  8.13,103.63 270 top
J57  Vertical Qwiic Connector  [JST04_1MM_VERT]  24.64,99.82 270 top
J58  [1X06_NO_SILK]  56.9,90.93 90 top
J59  [1X06_NO_SILK]  34.04,103.63 270 top
J60  Vertical Qwiic Connector  [JST04_1MM_VERT]  50.55,99.82 270 top
J61  [1X06_NO_SILK]  82.8,90.93 90 top
J62  [1X06_NO_SILK]  59.94,103.63 270 top
J63  Vertical Qwiic Connector  [JST04_1MM_VERT]  76.45,99.82 270 top
J64  [1X06_NO_SILK]  108.71,90.93 90 top
J65  [1X06_NO_SILK]  85.85,103.63 270 top
J66  Vertical Qwiic Connector  [JST04_1MM_VERT]  102.36,99.82 270 top
J67  [1X06_NO_SILK]  134.62,90.93 90 top
J68  [1X06_NO_SILK]  111.76,103.63 270 top
J69  Vertical Qwiic Connector  [JST04_1MM_VERT]  128.27,99.82 270 top
J70  [1X06_NO_SILK]  160.53,90.93 90 top
J71  [1X06_NO_SILK]  137.67,103.63 270 top
J72  Vertical Qwiic Connector  [JST04_1MM_VERT]  154.18,99.82 270 top
LOGO1  OSHW-LOGOS  [OSHW-LOGO-S]  19.56,18.29 0 bottom
LOGO2  SFE_LOGO_NAME_FLAME.1_INCH  [SFE_LOGO_NAME_FLAME_.1]  19.56,28.45 0 bottom
LOGO3  QWIIC_LOGO_3MM  [QWIIC_3MM]  27.43,26.29 0 top
LOGO4  OSHW-LOGOS  [OSHW-LOGO-S]  45.47,18.29 0 bottom
LOGO5  SFE_LOGO_NAME_FLAME.1_INCH  [SFE_LOGO_NAME_FLAME_.1]  45.47,28.45 0 bottom
LOGO6  QWIIC_LOGO_3MM  [QWIIC_3MM]  53.34,26.29 0 top
LOGO7  OSHW-LOGOS  [OSHW-LOGO-S]  71.37,18.29 0 bottom
LOGO8  SFE_LOGO_NAME_FLAME.1_INCH  [SFE_LOGO_NAME_FLAME_.1]  71.37,28.45 0 bottom
LOGO9  QWIIC_LOGO_3MM  [QWIIC_3MM]  79.25,26.29 0 top
LOGO10  OSHW-LOGOS  [OSHW-LOGO-S]  97.28,18.29 0 bottom
LOGO11  SFE_LOGO_NAME_FLAME.1_INCH  [SFE_LOGO_NAME_FLAME_.1]  97.28,28.45 0 bottom
LOGO12  QWIIC_LOGO_3MM  [QWIIC_3MM]  105.16,26.29 0 top
LOGO13  OSHW-LOGOS  [OSHW-LOGO-S]  123.19,18.29 0 bottom
LOGO14  SFE_LOGO_NAME_FLAME.1_INCH  [SFE_LOGO_NAME_FLAME_.1]  123.19,28.45 0 bottom
LOGO15  QWIIC_LOGO_3MM  [QWIIC_3MM]  131.06,26.29 0 top
LOGO16  OSHW-LOGOS  [OSHW-LOGO-S]  149.1,18.29 0 bottom
LOGO17  SFE_LOGO_NAME_FLAME.1_INCH  [SFE_LOGO_NAME_FLAME_.1]  149.1,28.45 0 bottom
LOGO18  QWIIC_LOGO_3MM  [QWIIC_3MM]  156.97,26.29 0 top
LOGO19  OSHW-LOGOS  [OSHW-LOGO-S]  19.56,44.2 0 bottom
LOGO20  SFE_LOGO_NAME_FLAME.1_INCH  [SFE_LOGO_NAME_FLAME_.1]  19.56,54.36 0 bottom
LOGO21  QWIIC_LOGO_3MM  [QWIIC_3MM]  27.43,52.2 0 top
LOGO22  OSHW-LOGOS  [OSHW-LOGO-S]  45.47,44.2 0 bottom
LOGO23  SFE_LOGO_NAME_FLAME.1_INCH  [SFE_LOGO_NAME_FLAME_.1]  45.47,54.36 0 bottom
LOGO24  QWIIC_LOGO_3MM  [QWIIC_3MM]  53.34,52.2 0 top
LOGO25  OSHW-LOGOS  [OSHW-LOGO-S]  71.37,44.2 0 bottom
LOGO26  SFE_LOGO_NAME_FLAME.1_INCH  [SFE_LOGO_NAME_FLAME_.1]  71.37,54.36 0 bottom
LOGO27  QWIIC_LOGO_3MM  [QWIIC_3MM]  79.25,52.2 0 top
LOGO28  OSHW-LOGOS  [OSHW-LOGO-S]  97.28,44.2 0 bottom
LOGO29  SFE_LOGO_NAME_FLAME.1_INCH  [SFE_LOGO_NAME_FLAME_.1]  97.28,54.36 0 bottom
LOGO30  QWIIC_LOGO_3MM  [QWIIC_3MM]  105.16,52.2 0 top
LOGO31  OSHW-LOGOS  [OSHW-LOGO-S]  123.19,44.2 0 bottom
LOGO32  SFE_LOGO_NAME_FLAME.1_INCH  [SFE_LOGO_NAME_FLAME_.1]  123.19,54.36 0 bottom
LOGO33  QWIIC_LOGO_3MM  [QWIIC_3MM]  131.06,52.2 0 top
LOGO34  OSHW-LOGOS  [OSHW-LOGO-S]  149.1,44.2 0 bottom
LOGO35  SFE_LOGO_NAME_FLAME.1_INCH  [SFE_LOGO_NAME_FLAME_.1]  149.1,54.36 0 bottom
LOGO36  QWIIC_LOGO_3MM  [QWIIC_3MM]  156.97,52.2 0 top
LOGO37  OSHW-LOGOS  [OSHW-LOGO-S]  19.56,70.1 0 bottom
LOGO38  SFE_LOGO_NAME_FLAME.1_INCH  [SFE_LOGO_NAME_FLAME_.1]  19.56,80.26 0 bottom
LOGO39  QWIIC_LOGO_3MM  [QWIIC_3MM]  27.43,78.11 0 top
LOGO40  OSHW-LOGOS  [OSHW-LOGO-S]  45.47,70.1 0 bottom
LOGO41  SFE_LOGO_NAME_FLAME.1_INCH  [SFE_LOGO_NAME_FLAME_.1]  45.47,80.26 0 bottom
LOGO42  QWIIC_LOGO_3MM  [QWIIC_3MM]  53.34,78.11 0 top
LOGO43  OSHW-LOGOS  [OSHW-LOGO-S]  71.37,70.1 0 bottom
LOGO44  SFE_LOGO_NAME_FLAME.1_INCH  [SFE_LOGO_NAME_FLAME_.1]  71.37,80.26 0 bottom
LOGO45  QWIIC_LOGO_3MM  [QWIIC_3MM]  79.25,78.11 0 top
LOGO46  OSHW-LOGOS  [OSHW-LOGO-S]  97.28,70.1 0 bottom
LOGO47  SFE_LOGO_NAME_FLAME.1_INCH  [SFE_LOGO_NAME_FLAME_.1]  97.28,80.26 0 bottom
LOGO48  QWIIC_LOGO_3MM  [QWIIC_3MM]  105.16,78.11 0 top
LOGO49  OSHW-LOGOS  [OSHW-LOGO-S]  123.19,70.1 0 bottom
LOGO50  SFE_LOGO_NAME_FLAME.1_INCH  [SFE_LOGO_NAME_FLAME_.1]  123.19,80.26 0 bottom
LOGO51  QWIIC_LOGO_3MM  [QWIIC_3MM]  131.06,78.11 0 top
LOGO52  OSHW-LOGOS  [OSHW-LOGO-S]  149.1,70.1 0 bottom
LOGO53  SFE_LOGO_NAME_FLAME.1_INCH  [SFE_LOGO_NAME_FLAME_.1]  149.1,80.26 0 bottom
LOGO54  QWIIC_LOGO_3MM  [QWIIC_3MM]  156.97,78.11 0 top
LOGO55  OSHW-LOGOS  [OSHW-LOGO-S]  19.56,96.01 0 bottom
LOGO56  SFE_LOGO_NAME_FLAME.1_INCH  [SFE_LOGO_NAME_FLAME_.1]  19.56,106.17 0 bottom
LOGO57  QWIIC_LOGO_3MM  [QWIIC_3MM]  27.43,104.01 0 top
LOGO58  OSHW-LOGOS  [OSHW-LOGO-S]  45.47,96.01 0 bottom
LOGO59  SFE_LOGO_NAME_FLAME.1_INCH  [SFE_LOGO_NAME_FLAME_.1]  45.47,106.17 0 bottom
LOGO60  QWIIC_LOGO_3MM  [QWIIC_3MM]  53.34,104.01 0 top
LOGO61  OSHW-LOGOS  [OSHW-LOGO-S]  71.37,96.01 0 bottom
LOGO62  SFE_LOGO_NAME_FLAME.1_INCH  [SFE_LOGO_NAME_FLAME_.1]  71.37,106.17 0 bottom
LOGO63  QWIIC_LOGO_3MM  [QWIIC_3MM]  79.25,104.01 0 top
LOGO64  OSHW-LOGOS  [OSHW-LOGO-S]  97.28,96.01 0 bottom
LOGO65  SFE_LOGO_NAME_FLAME.1_INCH  [SFE_LOGO_NAME_FLAME_.1]  97.28,106.17 0 bottom
LOGO66  QWIIC_LOGO_3MM  [QWIIC_3MM]  105.16,104.01 0 top
LOGO67  OSHW-LOGOS  [OSHW-LOGO-S]  123.19,96.01 0 bottom
LOGO68  SFE_LOGO_NAME_FLAME.1_INCH  [SFE_LOGO_NAME_FLAME_.1]  123.19,106.17 0 bottom
LOGO69  QWIIC_LOGO_3MM  [QWIIC_3MM]  131.06,104.01 0 top
LOGO70  OSHW-LOGOS  [OSHW-LOGO-S]  149.1,96.01 0 bottom
LOGO71  SFE_LOGO_NAME_FLAME.1_INCH  [SFE_LOGO_NAME_FLAME_.1]  149.1,106.17 0 bottom
LOGO72  QWIIC_LOGO_3MM  [QWIIC_3MM]  156.97,104.01 0 top
PRO  PROD_ID_PASTE_SILK  [PRODUCT_IDENT_PASTE_SILK]  27.81,30.86 90 top
PRO1  PROD_ID_PASTE_SILK  [PRODUCT_IDENT_PASTE_SILK]  53.72,30.86 90 top
PRO2  PROD_ID_PASTE_SILK  [PRODUCT_IDENT_PASTE_SILK]  79.63,30.86 90 top
PRO3  PROD_ID_PASTE_SILK  [PRODUCT_IDENT_PASTE_SILK]  105.54,30.86 90 top
PRO4  PROD_ID_PASTE_SILK  [PRODUCT_IDENT_PASTE_SILK]  131.44,30.86 90 top
PRO5  PROD_ID_PASTE_SILK  [PRODUCT_IDENT_PASTE_SILK]  157.35,30.86 90 top
PRO6  PROD_ID_PASTE_SILK  [PRODUCT_IDENT_PASTE_SILK]  27.81,56.77 90 top
PRO7  PROD_ID_PASTE_SILK  [PRODUCT_IDENT_PASTE_SILK]  53.72,56.77 90 top
PRO8  PROD_ID_PASTE_SILK  [PRODUCT_IDENT_PASTE_SILK]  79.63,56.77 90 top
PRO9  PROD_ID_PASTE_SILK  [PRODUCT_IDENT_PASTE_SILK]  105.54,56.77 90 top
PRO10  PROD_ID_PASTE_SILK  [PRODUCT_IDENT_PASTE_SILK]  131.44,56.77 90 top
PRO11  PROD_ID_PASTE_SILK  [PRODUCT_IDENT_PASTE_SILK]  157.35,56.77 90 top
PRO12  PROD_ID_PASTE_SILK  [PRODUCT_IDENT_PASTE_SILK]  27.81,82.68 90 top
PRO13  PROD_ID_PASTE_SILK  [PRODUCT_IDENT_PASTE_SILK]  53.72,82.68 90 top
PRO14  PROD_ID_PASTE_SILK  [PRODUCT_IDENT_PASTE_SILK]  79.63,82.68 90 top
PRO15  PROD_ID_PASTE_SILK  [PRODUCT_IDENT_PASTE_SILK]  105.54,82.68 90 top
PRO16  PROD_ID_PASTE_SILK  [PRODUCT_IDENT_PASTE_SILK]  131.44,82.68 90 top
PRO17  PROD_ID_PASTE_SILK  [PRODUCT_IDENT_PASTE_SILK]  157.35,82.68 90 top
PRO18  PROD_ID_PASTE_SILK  [PRODUCT_IDENT_PASTE_SILK]  27.81,108.59 90 top
PRO19  PROD_ID_PASTE_SILK  [PRODUCT_IDENT_PASTE_SILK]  53.72,108.59 90 top
PRO20  PROD_ID_PASTE_SILK  [PRODUCT_IDENT_PASTE_SILK]  79.63,108.59 90 top
PRO21  PROD_ID_PASTE_SILK  [PRODUCT_IDENT_PASTE_SILK]  105.54,108.59 90 top
PRO22  PROD_ID_PASTE_SILK  [PRODUCT_IDENT_PASTE_SILK]  131.44,108.59 90 top
PRO23  PROD_ID_PASTE_SILK  [PRODUCT_IDENT_PASTE_SILK]  157.35,108.59 90 top
PWR  JUMPER-SMT_2_NC_TRACE_SILK  [SMT-JUMPER_2_NC_TRACE_SILK]  15.11,17.91 0 bottom
PWR1  JUMPER-SMT_2_NC_TRACE_SILK  [SMT-JUMPER_2_NC_TRACE_SILK]  41.02,17.91 0 bottom
PWR2  JUMPER-SMT_2_NC_TRACE_SILK  [SMT-JUMPER_2_NC_TRACE_SILK]  66.93,17.91 0 bottom
PWR3  JUMPER-SMT_2_NC_TRACE_SILK  [SMT-JUMPER_2_NC_TRACE_SILK]  92.84,17.91 0 bottom
PWR4  JUMPER-SMT_2_NC_TRACE_SILK  [SMT-JUMPER_2_NC_TRACE_SILK]  118.75,17.91 0 bottom
PWR5  JUMPER-SMT_2_NC_TRACE_SILK  [SMT-JUMPER_2_NC_TRACE_SILK]  144.65,17.91 0 bottom
PWR6  JUMPER-SMT_2_NC_TRACE_SILK  [SMT-JUMPER_2_NC_TRACE_SILK]  15.11,43.81 0 bottom
PWR7  JUMPER-SMT_2_NC_TRACE_SILK  [SMT-JUMPER_2_NC_TRACE_SILK]  41.02,43.81 0 bottom
PWR8  JUMPER-SMT_2_NC_TRACE_SILK  [SMT-JUMPER_2_NC_TRACE_SILK]  66.93,43.81 0 bottom
PWR9  JUMPER-SMT_2_NC_TRACE_SILK  [SMT-JUMPER_2_NC_TRACE_SILK]  92.84,43.81 0 bottom
PWR10  JUMPER-SMT_2_NC_TRACE_SILK  [SMT-JUMPER_2_NC_TRACE_SILK]  118.75,43.81 0 bottom
PWR11  JUMPER-SMT_2_NC_TRACE_SILK  [SMT-JUMPER_2_NC_TRACE_SILK]  144.65,43.81 0 bottom
PWR12  JUMPER-SMT_2_NC_TRACE_SILK  [SMT-JUMPER_2_NC_TRACE_SILK]  15.11,69.72 0 bottom
PWR13  JUMPER-SMT_2_NC_TRACE_SILK  [SMT-JUMPER_2_NC_TRACE_SILK]  41.02,69.72 0 bottom
PWR14  JUMPER-SMT_2_NC_TRACE_SILK  [SMT-JUMPER_2_NC_TRACE_SILK]  66.93,69.72 0 bottom
PWR15  JUMPER-SMT_2_NC_TRACE_SILK  [SMT-JUMPER_2_NC_TRACE_SILK]  92.84,69.72 0 bottom
PWR16  JUMPER-SMT_2_NC_TRACE_SILK  [SMT-JUMPER_2_NC_TRACE_SILK]  118.75,69.72 0 bottom
PWR17  JUMPER-SMT_2_NC_TRACE_SILK  [SMT-JUMPER_2_NC_TRACE_SILK]  144.65,69.72 0 bottom
PWR18  JUMPER-SMT_2_NC_TRACE_SILK  [SMT-JUMPER_2_NC_TRACE_SILK]  15.11,95.63 0 bottom
PWR19  JUMPER-SMT_2_NC_TRACE_SILK  [SMT-JUMPER_2_NC_TRACE_SILK]  41.02,95.63 0 bottom
PWR20  JUMPER-SMT_2_NC_TRACE_SILK  [SMT-JUMPER_2_NC_TRACE_SILK]  66.93,95.63 0 bottom
PWR21  JUMPER-SMT_2_NC_TRACE_SILK  [SMT-JUMPER_2_NC_TRACE_SILK]  92.84,95.63 0 bottom
PWR22  JUMPER-SMT_2_NC_TRACE_SILK  [SMT-JUMPER_2_NC_TRACE_SILK]  118.75,95.63 0 bottom
PWR23  JUMPER-SMT_2_NC_TRACE_SILK  [SMT-JUMPER_2_NC_TRACE_SILK]  144.65,95.63 0 bottom
R1  1k  [0402-TIGHT]  39.75,19.3 0 top
R2  1k  [0402-TIGHT]  13.84,19.3 0 top
R3  2.2k  [0402-TIGHT]  23.24,21.34 270 top
R4  2.2k  [0402-TIGHT]  23.24,23.37 90 top
R5  2.2k  [0402-TIGHT]  49.15,21.34 270 top
R6  2.2k  [0402-TIGHT]  49.15,23.37 90 top
R7  1k  [0402-TIGHT]  65.66,19.3 0 top
R8  2.2k  [0402-TIGHT]  75.06,21.34 270 top
R9  2.2k  [0402-TIGHT]  75.06,23.37 90 top
R10  1k  [0402-TIGHT]  91.57,19.3 0 top
R11  2.2k  [0402-TIGHT]  100.97,21.34 270 top
R12  2.2k  [0402-TIGHT]  100.97,23.37 90 top
R13  1k  [0402-TIGHT]  117.48,19.3 0 top
R14  2.2k  [0402-TIGHT]  126.87,21.34 270 top
R15  2.2k  [0402-TIGHT]  126.87,23.37 90 top
R16  1k  [0402-TIGHT]  143.38,19.3 0 top
R17  2.2k  [0402-TIGHT]  152.78,21.34 270 top
R18  2.2k  [0402-TIGHT]  152.78,23.37 90 top
R19  1k  [0402-TIGHT]  13.84,45.21 0 top
R20  2.2k  [0402-TIGHT]  23.24,47.24 270 top
R21  2.2k  [0402-TIGHT]  23.24,49.28 90 top
R22  1k  [0402-TIGHT]  39.75,45.21 0 top
R23  2.2k  [0402-TIGHT]  49.15,47.24 270 top
R24  2.2k  [0402-TIGHT]  49.15,49.28 90 top
R25  1k  [0402-TIGHT]  65.66,45.21 0 top
R26  2.2k  [0402-TIGHT]  75.06,47.24 270 top
R27  2.2k  [0402-TIGHT]  75.06,49.28 90 top
R28  1k  [0402-TIGHT]  91.57,45.21 0 top
R29  2.2k  [0402-TIGHT]  100.97,47.24 270 top
R30  2.2k  [0402-TIGHT]  100.97,49.28 90 top
R31  1k  [0402-TIGHT]  117.48,45.21 0 top
R32  2.2k  [0402-TIGHT]  126.87,47.24 270 top
R33  2.2k  [0402-TIGHT]  126.87,49.28 90 top
R34  1k  [0402-TIGHT]  143.38,45.21 0 top
R35  2.2k  [0402-TIGHT]  152.78,47.24 270 top
R36  2.2k  [0402-TIGHT]  152.78,49.28 90 top
R37  1k  [0402-TIGHT]  13.84,71.12 0 top
R38  2.2k  [0402-TIGHT]  23.24,73.15 270 top
R39  2.2k  [0402-TIGHT]  23.24,75.18 90 top
R40  1k  [0402-TIGHT]  39.75,71.12 0 top
R41  2.2k  [0402-TIGHT]  49.15,73.15 270 top
R42  2.2k  [0402-TIGHT]  49.15,75.18 90 top
R43  1k  [0402-TIGHT]  65.66,71.12 0 top
R44  2.2k  [0402-TIGHT]  75.06,73.15 270 top
R45  2.2k  [0402-TIGHT]  75.06,75.18 90 top
R46  1k  [0402-TIGHT]  91.57,71.12 0 top
R47  2.2k  [0402-TIGHT]  100.97,73.15 270 top
R48  2.2k  [0402-TIGHT]  100.97,75.18 90 top
R49  1k  [0402-TIGHT]  117.48,71.12 0 top
R50  2.2k  [0402-TIGHT]  126.87,73.15 270 top
R51  2.2k  [0402-TIGHT]  126.87,75.18 90 top
R52  1k  [0402-TIGHT]  143.38,71.12 0 top
R53  2.2k  [0402-TIGHT]  152.78,73.15 270 top
R54  2.2k  [0402-TIGHT]  152.78,75.18 90 top
R55  1k  [0402-TIGHT]  13.84,97.03 0 top
R56  2.2k  [0402-TIGHT]  23.24,99.06 270 top
R57  2.2k  [0402-TIGHT]  23.24,101.09 90 top
R58  1k  [0402-TIGHT]  39.75,97.03 0 top
R59  2.2k  [0402-TIGHT]  49.15,99.06 270 top
R60  2.2k  [0402-TIGHT]  49.15,101.09 90 top
R61  1k  [0402-TIGHT]  65.66,97.03 0 top
R62  2.2k  [0402-TIGHT]  75.06,99.06 270 top
R63  2.2k  [0402-TIGHT]  75.06,101.09 90 top
R64  1k  [0402-TIGHT]  91.57,97.03 0 top
R65  2.2k  [0402-TIGHT]  100.97,99.06 270 top
R66  2.2k  [0402-TIGHT]  100.97,101.09 90 top
R67  1k  [0402-TIGHT]  117.48,97.03 0 top
R68  2.2k  [0402-TIGHT]  126.87,99.06 270 top
R69  2.2k  [0402-TIGHT]  126.87,101.09 90 top
R70  1k  [0402-TIGHT]  143.38,97.03 0 top
R71  2.2k  [0402-TIGHT]  152.78,99.06 270 top
R72  2.2k  [0402-TIGHT]  152.78,101.09 90 top
TP1  TEST-POINT3  [PAD.03X.03]  27.81,23.37 0 bottom
TP2  TEST-POINT3  [PAD.03X.03]  27.81,20.83 0 bottom
TP3  TEST-POINT3  [PAD.03X.03]  13.21,22.73 0 bottom
TP4  TEST-POINT3  [PAD.03X.03]  53.72,23.37 0 bottom
TP5  TEST-POINT3  [PAD.03X.03]  53.72,20.83 0 bottom
TP6  TEST-POINT3  [PAD.03X.03]  39.12,22.73 0 bottom
TP7  TEST-POINT3  [PAD.03X.03]  79.63,23.37 0 bottom
TP8  TEST-POINT3  [PAD.03X.03]  79.63,20.83 0 bottom
TP9  TEST-POINT3  [PAD.03X.03]  65.02,22.73 0 bottom
TP10  TEST-POINT3  [PAD.03X.03]  105.54,23.37 0 bottom
TP11  TEST-POINT3  [PAD.03X.03]  105.54,20.83 0 bottom
TP12  TEST-POINT3  [PAD.03X.03]  90.93,22.73 0 bottom
TP13  TEST-POINT3  [PAD.03X.03]  131.44,23.37 0 bottom
TP14  TEST-POINT3  [PAD.03X.03]  131.44,20.83 0 bottom
TP15  TEST-POINT3  [PAD.03X.03]  116.84,22.73 0 bottom
TP16  TEST-POINT3  [PAD.03X.03]  157.35,23.37 0 bottom
TP17  TEST-POINT3  [PAD.03X.03]  157.35,20.83 0 bottom
TP18  TEST-POINT3  [PAD.03X.03]  142.75,22.73 0 bottom
TP19  TEST-POINT3  [PAD.03X.03]  27.81,49.28 0 bottom
TP20  TEST-POINT3  [PAD.03X.03]  27.81,46.74 0 bottom
TP21  TEST-POINT3  [PAD.03X.03]  13.21,48.64 0 bottom
TP22  TEST-POINT3  [PAD.03X.03]  53.72,49.28 0 bottom
TP23  TEST-POINT3  [PAD.03X.03]  53.72,46.74 0 bottom
TP24  TEST-POINT3  [PAD.03X.03]  39.12,48.64 0 bottom
TP25  TEST-POINT3  [PAD.03X.03]  79.63,49.28 0 bottom
TP26  TEST-POINT3  [PAD.03X.03]  79.63,46.74 0 bottom
TP27  TEST-POINT3  [PAD.03X.03]  65.02,48.64 0 bottom
TP28  TEST-POINT3  [PAD.03X.03]  105.54,49.28 0 bottom
TP29  TEST-POINT3  [PAD.03X.03]  105.54,46.74 0 bottom
TP30  TEST-POINT3  [PAD.03X.03]  90.93,48.64 0 bottom
TP31  TEST-POINT3  [PAD.03X.03]  131.44,49.28 0 bottom
TP32  TEST-POINT3  [PAD.03X.03]  131.44,46.74 0 bottom
TP33  TEST-POINT3  [PAD.03X.03]  116.84,48.64 0 bottom
TP34  TEST-POINT3  [PAD.03X.03]  157.35,49.28 0 bottom
TP35  TEST-POINT3  [PAD.03X.03]  157.35,46.74 0 bottom
TP36  TEST-POINT3  [PAD.03X.03]  142.75,48.64 0 bottom
TP37  TEST-POINT3  [PAD.03X.03]  27.81,75.18 0 bottom
TP38  TEST-POINT3  [PAD.03X.03]  27.81,72.64 0 bottom
TP39  TEST-POINT3  [PAD.03X.03]  13.21,74.55 0 bottom
TP40  TEST-POINT3  [PAD.03X.03]  53.72,75.18 0 bottom
TP41  TEST-POINT3  [PAD.03X.03]  53.72,72.64 0 bottom
TP42  TEST-POINT3  [PAD.03X.03]  39.12,74.55 0 bottom
TP43  TEST-POINT3  [PAD.03X.03]  79.63,75.18 0 bottom
TP44  TEST-POINT3  [PAD.03X.03]  79.63,72.64 0 bottom
TP45  TEST-POINT3  [PAD.03X.03]  65.02,74.55 0 bottom
TP46  TEST-POINT3  [PAD.03X.03]  105.54,75.18 0 bottom
TP47  TEST-POINT3  [PAD.03X.03]  105.54,72.64 0 bottom
TP48  TEST-POINT3  [PAD.03X.03]  90.93,74.55 0 bottom
TP49  TEST-POINT3  [PAD.03X.03]  131.44,75.18 0 bottom
TP50  TEST-POINT3  [PAD.03X.03]  131.44,72.64 0 bottom
TP51  TEST-POINT3  [PAD.03X.03]  116.84,74.55 0 bottom
TP52  TEST-POINT3  [PAD.03X.03]  157.35,75.18 0 bottom
TP53  TEST-POINT3  [PAD.03X.03]  157.35,72.64 0 bottom
TP54  TEST-POINT3  [PAD.03X.03]  142.75,74.55 0 bottom
TP55  TEST-POINT3  [PAD.03X.03]  27.81,101.09 0 bottom
TP56  TEST-POINT3  [PAD.03X.03]  27.81,98.55 0 bottom
TP57  TEST-POINT3  [PAD.03X.03]  13.21,100.46 0 bottom
TP58  TEST-POINT3  [PAD.03X.03]  53.72,101.09 0 bottom
TP59  TEST-POINT3  [PAD.03X.03]  53.72,98.55 0 bottom
TP60  TEST-POINT3  [PAD.03X.03]  39.12,100.46 0 bottom
TP61  TEST-POINT3  [PAD.03X.03]  79.63,101.09 0 bottom
TP62  TEST-POINT3  [PAD.03X.03]  79.63,98.55 0 bottom
TP63  TEST-POINT3  [PAD.03X.03]  65.02,100.46 0 bottom
TP64  TEST-POINT3  [PAD.03X.03]  105.54,101.09 0 bottom
TP65  TEST-POINT3  [PAD.03X.03]  105.54,98.55 0 bottom
TP66  TEST-POINT3  [PAD.03X.03]  90.93,100.46 0 bottom
TP67  TEST-POINT3  [PAD.03X.03]  131.44,101.09 0 bottom
TP68  TEST-POINT3  [PAD.03X.03]  131.44,98.55 0 bottom
TP69  TEST-POINT3  [PAD.03X.03]  116.84,100.46 0 bottom
TP70  TEST-POINT3  [PAD.03X.03]  157.35,101.09 0 bottom
TP71  TEST-POINT3  [PAD.03X.03]  157.35,98.55 0 bottom
TP72  TEST-POINT3  [PAD.03X.03]  142.75,100.46 0 bottom
U1  IN100  [IN100]  19.56,22.73 0 top
U2  IN100  [IN100]  45.47,22.73 0 top
U3  IN100  [IN100]  71.37,22.73 0 top
U4  IN100  [IN100]  97.28,22.73 0 top
U5  IN100  [IN100]  123.19,22.73 0 top
U6  IN100  [IN100]  149.1,22.73 0 top
U7  IN100  [IN100]  19.56,48.64 0 top
U8  IN100  [IN100]  45.47,48.64 0 top
U9  IN100  [IN100]  71.37,48.64 0 top
U10  IN100  [IN100]  97.28,48.64 0 top
U11  IN100  [IN100]  123.19,48.64 0 top
U12  IN100  [IN100]  149.1,48.64 0 top
U13  IN100  [IN100]  19.56,74.55 0 top
U14  IN100  [IN100]  45.47,74.55 0 top
U15  IN100  [IN100]  71.37,74.55 0 top
U16  IN100  [IN100]  97.28,74.55 0 top
U17  IN100  [IN100]  123.19,74.55 0 top
U18  IN100  [IN100]  149.1,74.55 0 top
U19  IN100  [IN100]  19.56,100.46 0 top
U20  IN100  [IN100]  45.47,100.46 0 top
U21  IN100  [IN100]  71.37,100.46 0 top
U22  IN100  [IN100]  97.28,100.46 0 top
U23  IN100  [IN100]  123.19,100.46 0 top
U24  IN100  [IN100]  149.1,100.46 0 top
U$1  [BLUETOOTH0]  19.56,28.7 0 top
U$2  [#_7#0]  8.25,25.91 0 top
U$3  [#_6#0]  8.25,23.37 0 top
U$4  [SFE_LOGO_NAME_.1]  19.56,30.61 0 top
U$5  [BEACON_#_IN1000]  19.56,27.3 0 top
U$6  [#_5#0]  8.25,20.83 0 top
U$7  [#_4#0]  8.25,18.29 0 top
U$8  [SFE_LOGO_FLAME_.2]  10.67,29.46 0 top
U$9  [BLUETOOTH0]  19.56,26.16 0 bottom
U$10  [BEACON_#_IN1000]  19.56,24.77 0 bottom
U$11  [#I2C#0]  25.91,20.83 90 bottom
U$12  [#NOTES#0]  22.99,15.75 0 bottom
U$13  [#IO7_#0]  8.13,25.91 0 bottom
U$14  [#IO6_#0]  8.13,23.37 0 bottom
U$15  [#IO5_#0]  8.13,20.83 0 bottom
U$16  [#IO4_#0]  8.13,18.29 0 bottom
U$17  [#SW0_#0]  8.13,15.75 0 bottom
U$18  [#SW1_#0]  8.13,13.21 0 bottom
U$19  [#PWR#0]  15.11,19.56 0 bottom
U$20  [#SW0#3]  22.73,21.34 0 bottom
U$21  [SW00]  9.59,15.75 90 top
U$22  [SW10]  9.59,13.21 90 top
U$23  [RST0]  11.94,19.56 0 top
U$24  [#VCC#0]  22.73,22.86 0 bottom
U$25  [#BUS#0]  23.37,20.83 90 bottom
U$26  [PWR0]  11.94,16.13 0 top
U$27  [VBATT_OR_VCC_ONLY##0]  19.56,7.75 0 top
U$28  [DEV0]  28.45,28.57 0 top
U$29  [BLUETOOTH0]  45.47,28.7 0 top
U$30  [PRO0]  28.45,30.86 0 top
U$31  [SFE_LOGO_NAME_.1]  45.47,30.61 0 top
U$32  [BEACON_#_IN1000]  45.47,27.3 0 top
U$33  [#_7#0]  34.16,25.91 0 top
U$34  [#_6#0]  34.16,23.37 0 top
U$35  [#_5#0]  34.16,20.83 0 top
U$36  [#_4#0]  34.16,18.29 0 top
U$37  [SFE_LOGO_FLAME_.2]  36.58,29.46 0 top
U$38  [BLUETOOTH0]  45.47,26.16 0 bottom
U$39  [BEACON_#_IN1000]  45.47,24.77 0 bottom
U$40  [#IO7_#0]  34.04,25.91 0 bottom
U$41  [#IO6_#0]  34.04,23.37 0 bottom
U$42  [#IO5_#0]  34.04,20.83 0 bottom
U$43  [#IO4_#0]  34.04,18.29 0 bottom
U$44  [#SW0_#0]  34.04,15.75 0 bottom
U$45  [#SW1_#0]  34.04,13.21 0 bottom
U$46  [#PWR#0]  41.02,19.56 0 bottom
U$47  [SW00]  35.5,15.75 90 top
U$48  [SW10]  35.5,13.21 90 top
U$49  [#I2C#0]  51.82,20.83 90 bottom
U$50  [#SW0#3]  48.64,21.34 0 bottom
U$51  [#VCC#0]  48.64,22.86 0 bottom
U$52  [#BUS#0]  49.28,20.83 90 bottom
U$53  [PWR0]  37.85,16.13 0 top
U$54  [#NOTES#0]  48.89,15.75 0 bottom
U$55  [VBATT_OR_VCC_ONLY##0]  45.47,7.75 0 top
U$56  [RST0]  37.85,19.56 0 top
U$57  [DEV0]  54.36,28.57 0 top
U$58  [PRO0]  54.36,30.86 0 top
U$59  [BLUETOOTH0]  71.37,28.7 0 top
U$60  [SFE_LOGO_NAME_.1]  71.37,30.61 0 top
U$61  [BEACON_#_IN1000]  71.37,27.3 0 top
U$62  [#_7#0]  60.07,25.91 0 top
U$63  [#_6#0]  60.07,23.37 0 top
U$64  [#_5#0]  60.07,20.83 0 top
U$65  [#_4#0]  60.07,18.29 0 top
U$66  [SFE_LOGO_FLAME_.2]  62.48,29.46 0 top
U$67  [BLUETOOTH0]  71.37,26.16 0 bottom
U$68  [BEACON_#_IN1000]  71.37,24.77 0 bottom
U$69  [#IO7_#0]  59.94,25.91 0 bottom
U$70  [#IO6_#0]  59.94,23.37 0 bottom
U$71  [#IO5_#0]  59.94,20.83 0 bottom
U$72  [#IO4_#0]  59.94,18.29 0 bottom
U$73  [#SW0_#0]  59.94,15.75 0 bottom
U$74  [#SW1_#0]  59.94,13.21 0 bottom
U$75  [#PWR#0]  66.93,19.56 0 bottom
U$76  [SW00]  61.4,15.75 90 top
U$77  [SW10]  61.4,13.21 90 top
U$78  [#I2C#0]  77.72,20.83 90 bottom
U$79  [#SW0#3]  74.55,21.34 0 bottom
U$80  [#VCC#0]  74.55,22.86 0 bottom
U$81  [#BUS#0]  75.18,20.83 90 bottom
U$82  [PWR0]  63.75,16.13 0 top
U$83  [#NOTES#0]  74.8,15.75 0 bottom
U$84  [VBATT_OR_VCC_ONLY##0]  71.37,7.75 0 top
U$85  [RST0]  63.75,19.56 0 top
U$86  [DEV0]  80.26,28.57 0 top
U$87  [PRO0]  80.26,30.86 0 top
U$88  [BLUETOOTH0]  97.28,28.7 0 top
U$89  [SFE_LOGO_NAME_.1]  97.28,30.61 0 top
U$90  [BEACON_#_IN1000]  97.28,27.3 0 top
U$91  [#_7#0]  85.98,25.91 0 top
U$92  [#_6#0]  85.98,23.37 0 top
U$93  [#_5#0]  85.98,20.83 0 top
U$94  [#_4#0]  85.98,18.29 0 top
U$95  [SFE_LOGO_FLAME_.2]  88.39,29.46 0 top
U$96  [BLUETOOTH0]  97.28,26.16 0 bottom
U$97  [BEACON_#_IN1000]  97.28,24.77 0 bottom
U$98  [#IO7_#0]  85.85,25.91 0 bottom
U$99  [#IO6_#0]  85.85,23.37 0 bottom
U$100  [#IO5_#0]  85.85,20.83 0 bottom
U$101  [#IO4_#0]  85.85,18.29 0 bottom
U$102  [#SW0_#0]  85.85,15.75 0 bottom
U$103  [#SW1_#0]  85.85,13.21 0 bottom
U$104  [#PWR#0]  92.84,19.56 0 bottom
U$105  [SW00]  87.31,15.75 90 top
U$106  [SW10]  87.31,13.21 90 top
U$107  [#I2C#0]  103.63,20.83 90 bottom
U$108  [#SW0#3]  100.46,21.34 0 bottom
U$109  [#VCC#0]  100.46,22.86 0 bottom
U$110  [#BUS#0]  101.09,20.83 90 bottom
U$111  [PWR0]  89.66,16.13 0 top
U$112  [#NOTES#0]  100.71,15.75 0 bottom
U$113  [VBATT_OR_VCC_ONLY##0]  97.28,7.75 0 top
U$114  [RST0]  89.66,19.56 0 top
U$115  [DEV0]  106.17,28.57 0 top
U$116  [PRO0]  106.17,30.86 0 top
U$117  [BLUETOOTH0]  123.19,28.7 0 top
U$118  [SFE_LOGO_NAME_.1]  123.19,30.61 0 top
U$119  [BEACON_#_IN1000]  123.19,27.3 0 top
U$120  [#_7#0]  111.89,25.91 0 top
U$121  [#_6#0]  111.89,23.37 0 top
U$122  [#_5#0]  111.89,20.83 0 top
U$123  [#_4#0]  111.89,18.29 0 top
U$124  [SFE_LOGO_FLAME_.2]  114.3,29.46 0 top
U$125  [BLUETOOTH0]  123.19,26.16 0 bottom
U$126  [BEACON_#_IN1000]  123.19,24.77 0 bottom
U$127  [#IO7_#0]  111.76,25.91 0 bottom
U$128  [#IO6_#0]  111.76,23.37 0 bottom
U$129  [#IO5_#0]  111.76,20.83 0 bottom
U$130  [#IO4_#0]  111.76,18.29 0 bottom
U$131  [#SW0_#0]  111.76,15.75 0 bottom
U$132  [#SW1_#0]  111.76,13.21 0 bottom
U$133  [#PWR#0]  118.75,19.56 0 bottom
U$134  [SW00]  113.22,15.75 90 top
U$135  [SW10]  113.22,13.21 90 top
U$136  [#I2C#0]  129.54,20.83 90 bottom
U$137  [#SW0#3]  126.37,21.34 0 bottom
U$138  [#VCC#0]  126.37,22.86 0 bottom
U$139  [#BUS#0]  127,20.83 90 bottom
U$140  [PWR0]  115.57,16.13 0 top
U$141  [#NOTES#0]  126.62,15.75 0 bottom
U$142  [VBATT_OR_VCC_ONLY##0]  123.19,7.75 0 top
U$143  [RST0]  115.57,19.56 0 top
U$144  [DEV0]  132.08,28.57 0 top
U$145  [PRO0]  132.08,30.86 0 top
U$146  [BLUETOOTH0]  149.1,28.7 0 top
U$147  [SFE_LOGO_NAME_.1]  149.1,30.61 0 top
U$148  [BEACON_#_IN1000]  149.1,27.3 0 top
U$149  [#_7#0]  137.8,25.91 0 top
U$150  [#_6#0]  137.8,23.37 0 top
U$151  [#_5#0]  137.8,20.83 0 top
U$152  [#_4#0]  137.8,18.29 0 top
U$153  [SFE_LOGO_FLAME_.2]  140.21,29.46 0 top
U$154  [BLUETOOTH0]  149.1,26.16 0 bottom
U$155  [BEACON_#_IN1000]  149.1,24.77 0 bottom
U$156  [#IO7_#0]  137.67,25.91 0 bottom
U$157  [#IO6_#0]  137.67,23.37 0 bottom
U$158  [#IO5_#0]  137.67,20.83 0 bottom
U$159  [#IO4_#0]  137.67,18.29 0 bottom
U$160  [#SW0_#0]  137.67,15.75 0 bottom
U$161  [#SW1_#0]  137.67,13.21 0 bottom
U$162  [#PWR#0]  144.65,19.56 0 bottom
U$163  [SW00]  139.13,15.75 90 top
U$164  [SW10]  139.13,13.21 90 top
U$165  [#I2C#0]  155.45,20.83 90 bottom
U$166  [#SW0#3]  152.27,21.34 0 bottom
U$167  [#VCC#0]  152.27,22.86 0 bottom
U$168  [#BUS#0]  152.91,20.83 90 bottom
U$169  [PWR0]  141.48,16.13 0 top
U$170  [#NOTES#0]  152.53,15.75 0 bottom
U$171  [VBATT_OR_VCC_ONLY##0]  149.1,7.75 0 top
U$172  [RST0]  141.48,19.56 0 top
U$173  [DEV0]  157.99,28.57 0 top
U$174  [PRO0]  157.99,30.86 0 top
U$175  [BLUETOOTH0]  19.56,54.61 0 top